# Altium PCB UDEMY_ALI_ALCAN.PcbDoc (part 1 of 3)
Units mm, origin at the board's own origin, x right, y up, seen from the top; angles counter-clockwise.
Board outline 102 x 100 mm, 4 copper layers (Top Layer, GROUND, POWER, Bottom Layer), stack 1.369 mm thick; 127 components, 90 nets, 438 pads, 96 vias.
Unrouted connection lines stored in the file: 1.
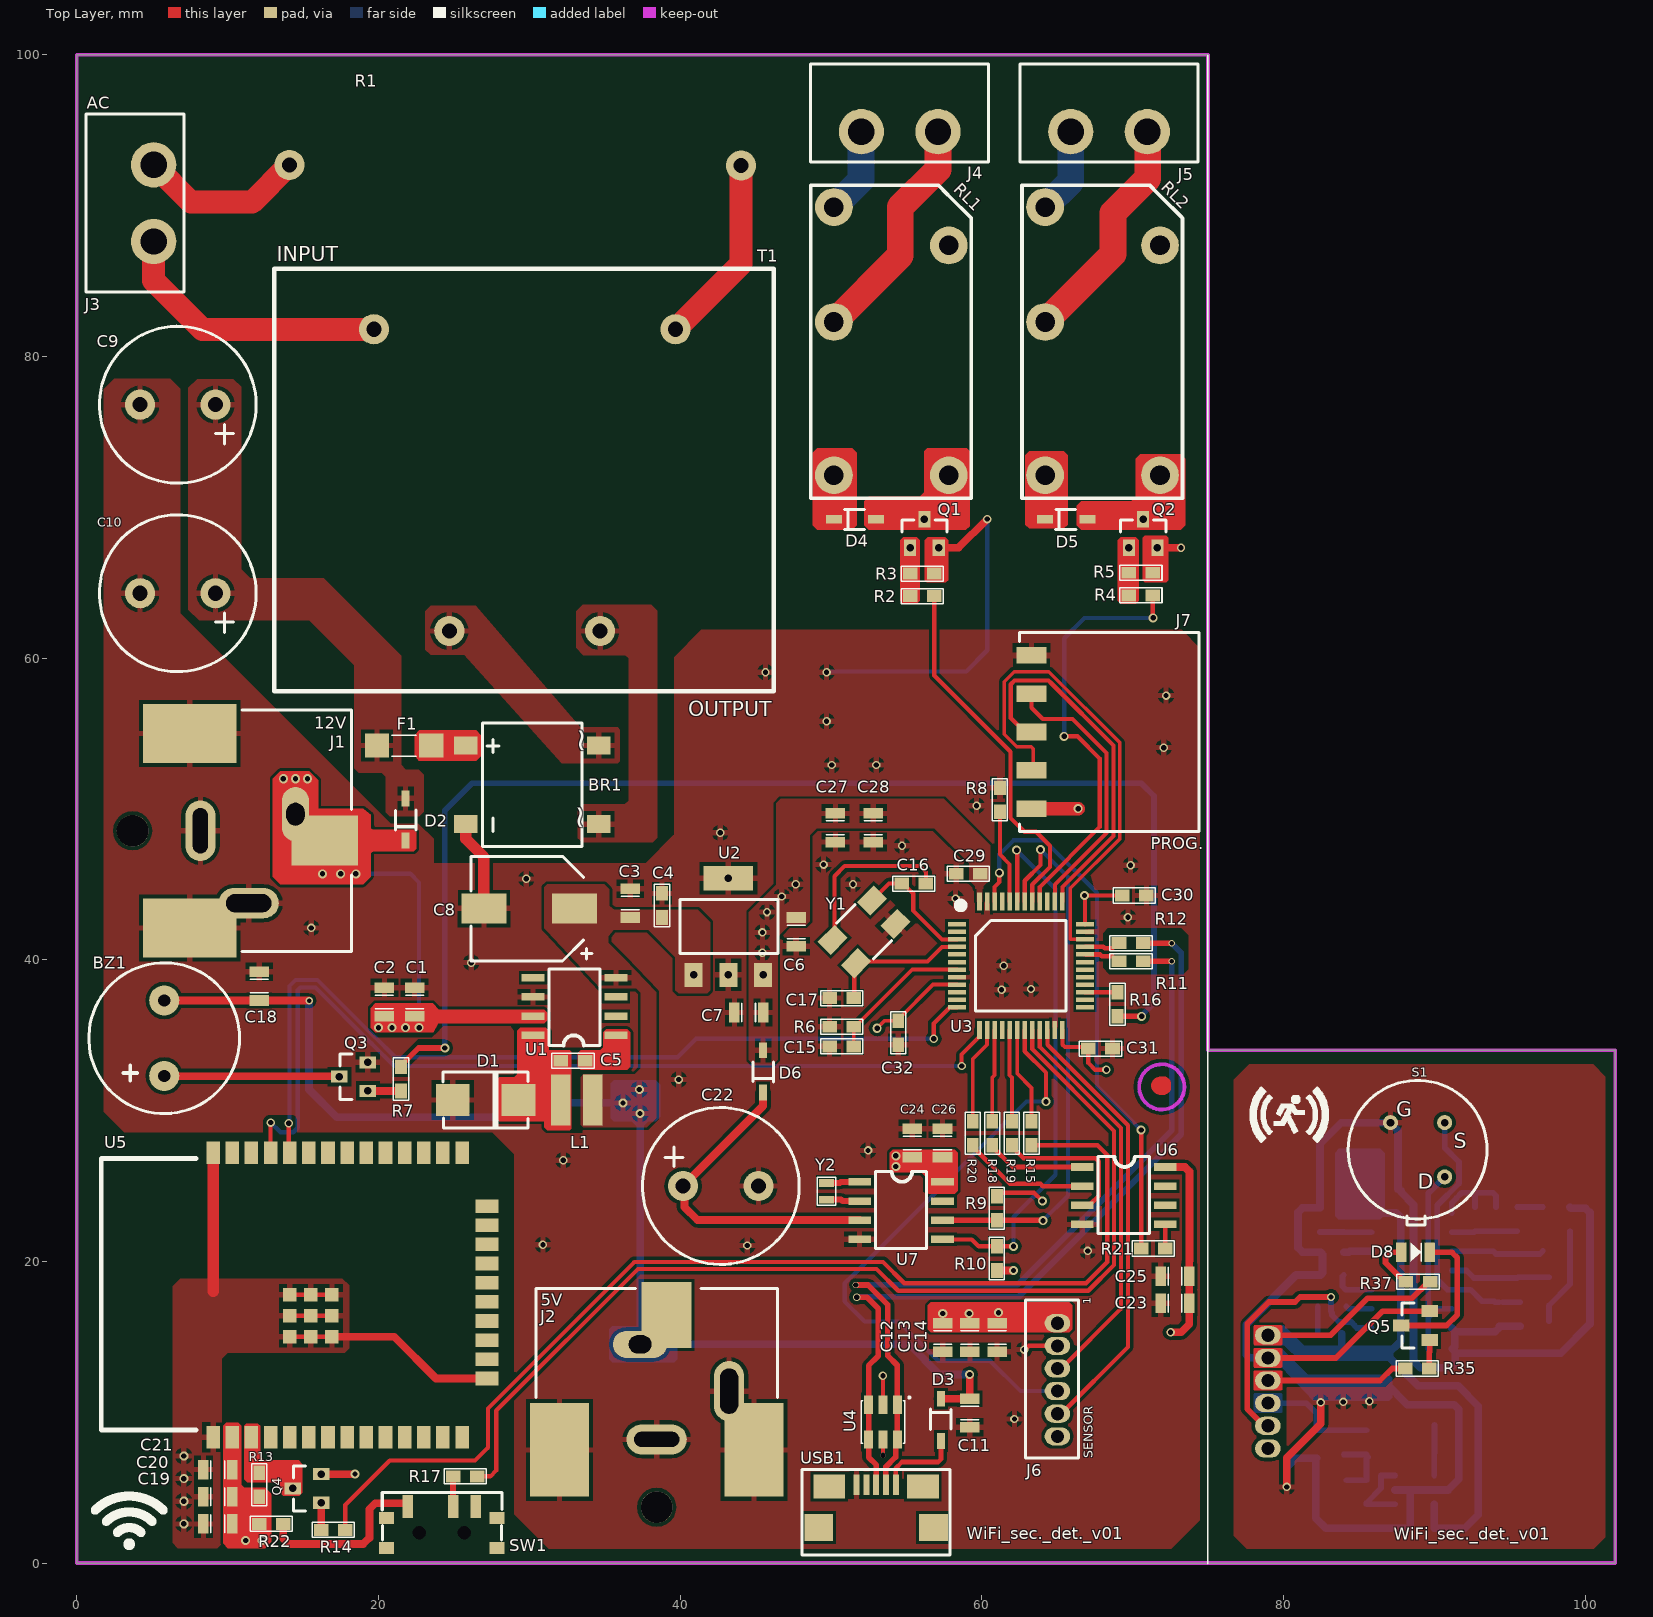
[diagram p0: Top Layer view]
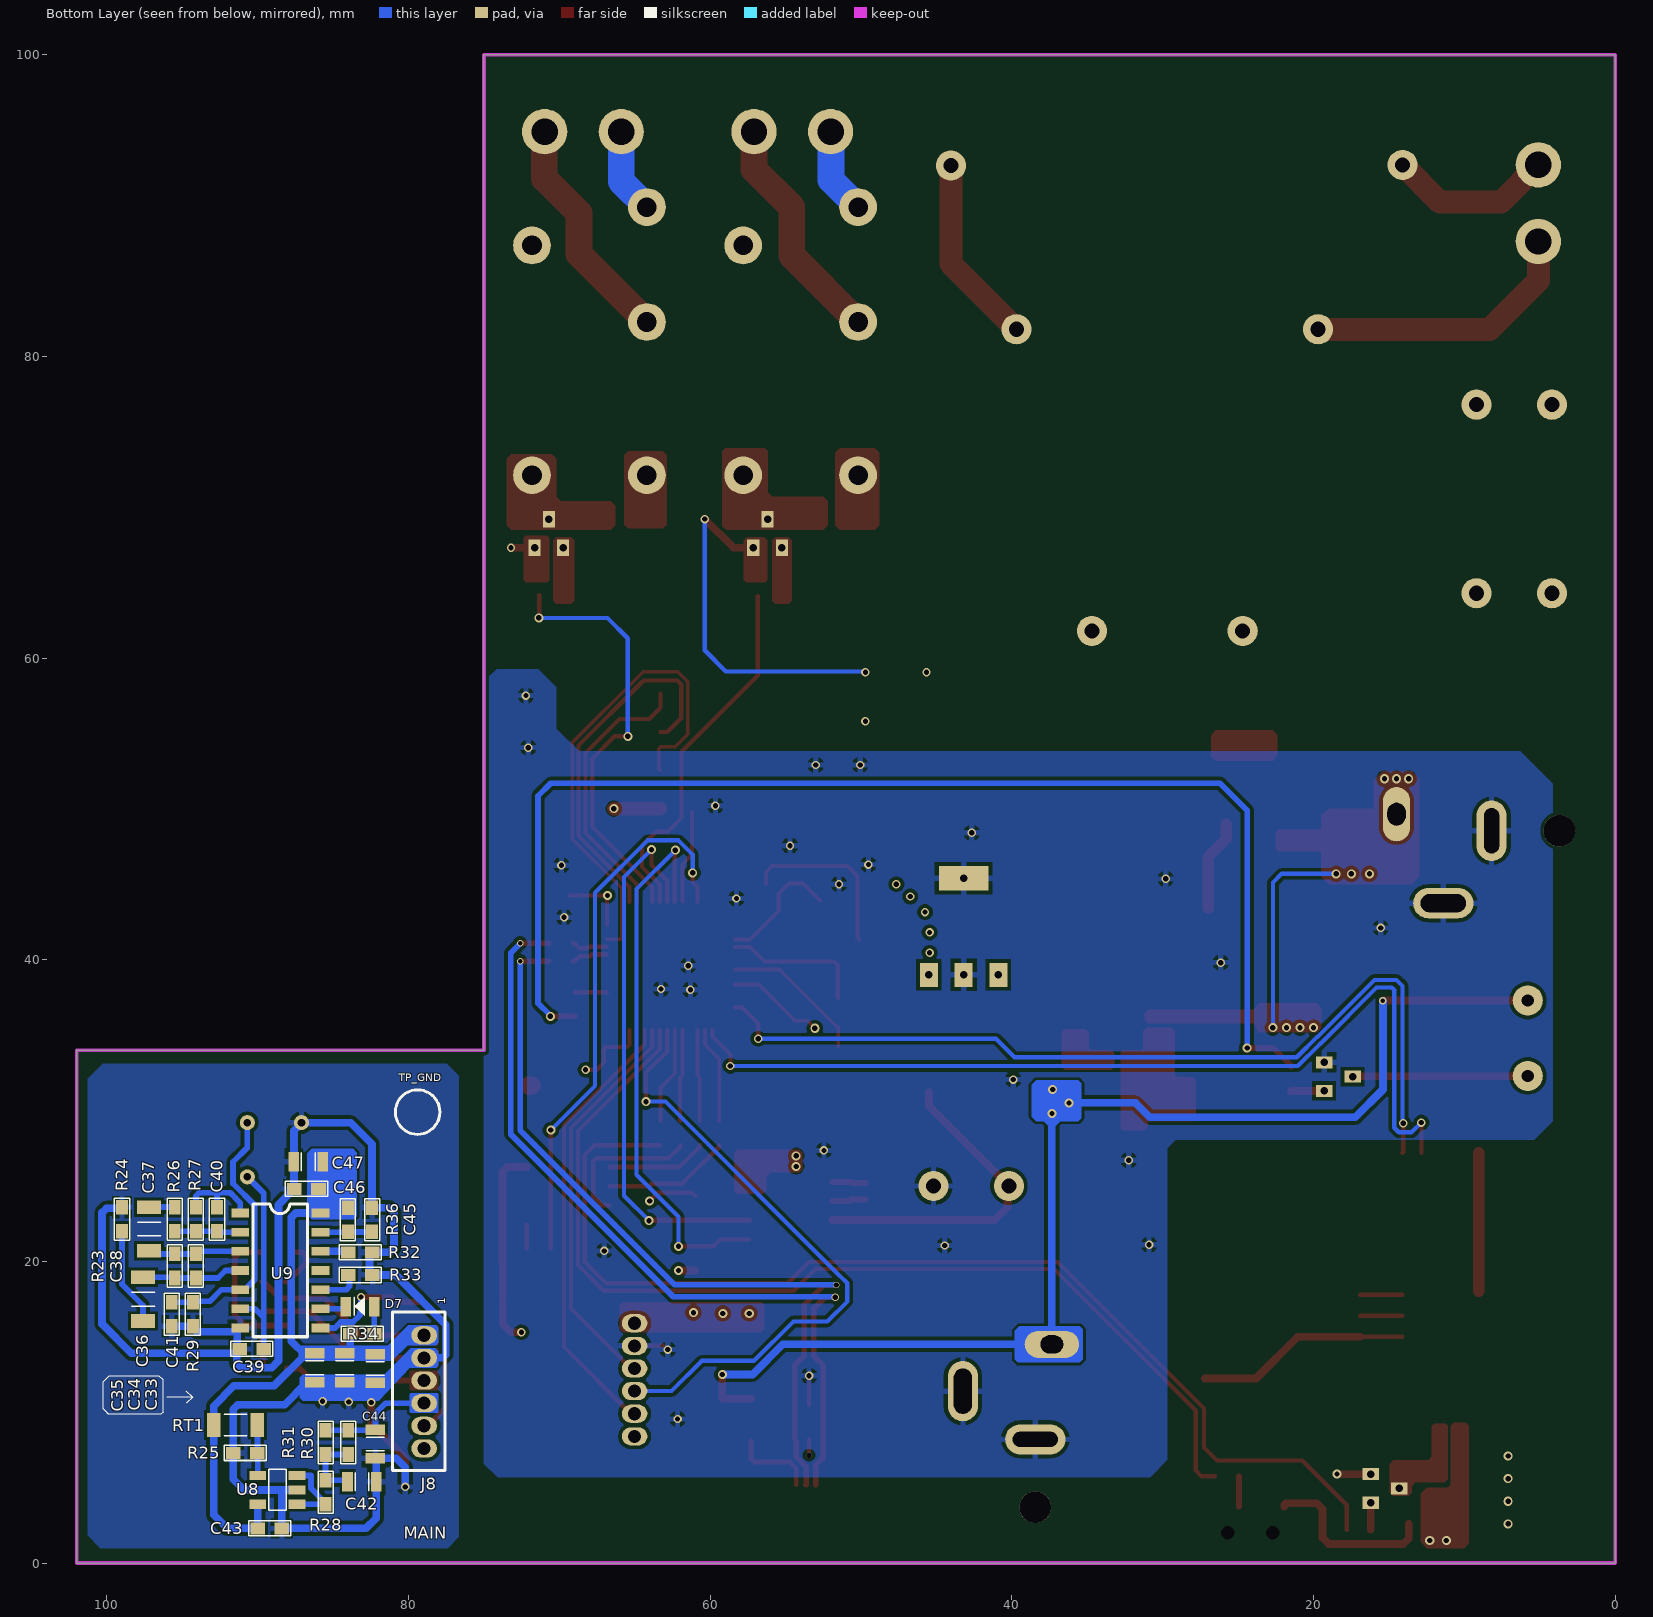
[diagram p1: Bottom Layer view, seen from below]
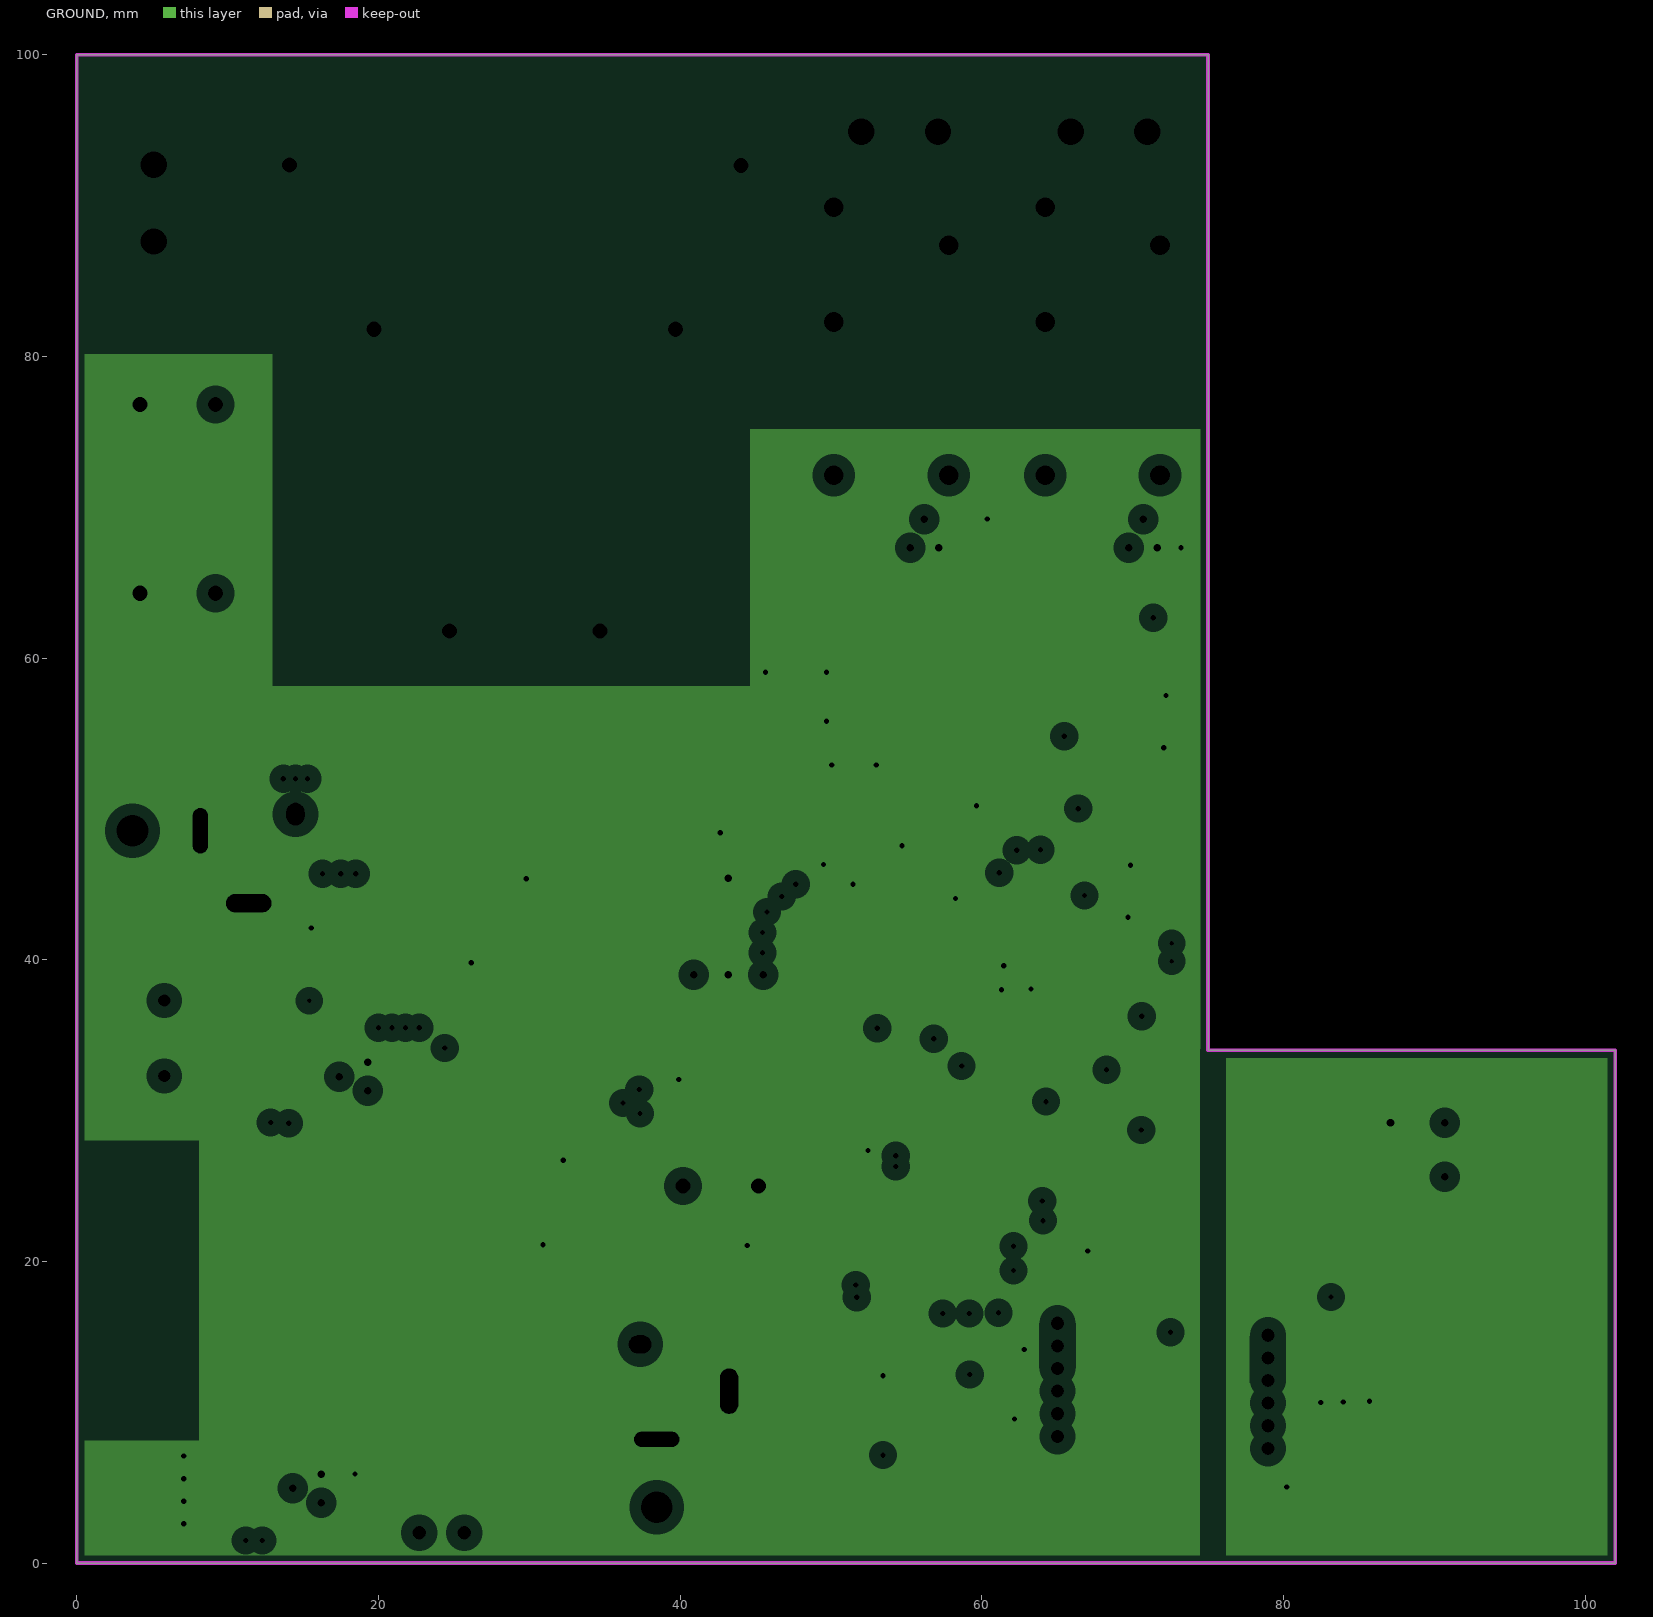
[diagram p2: GROUND, clearances drawn from the general rule]
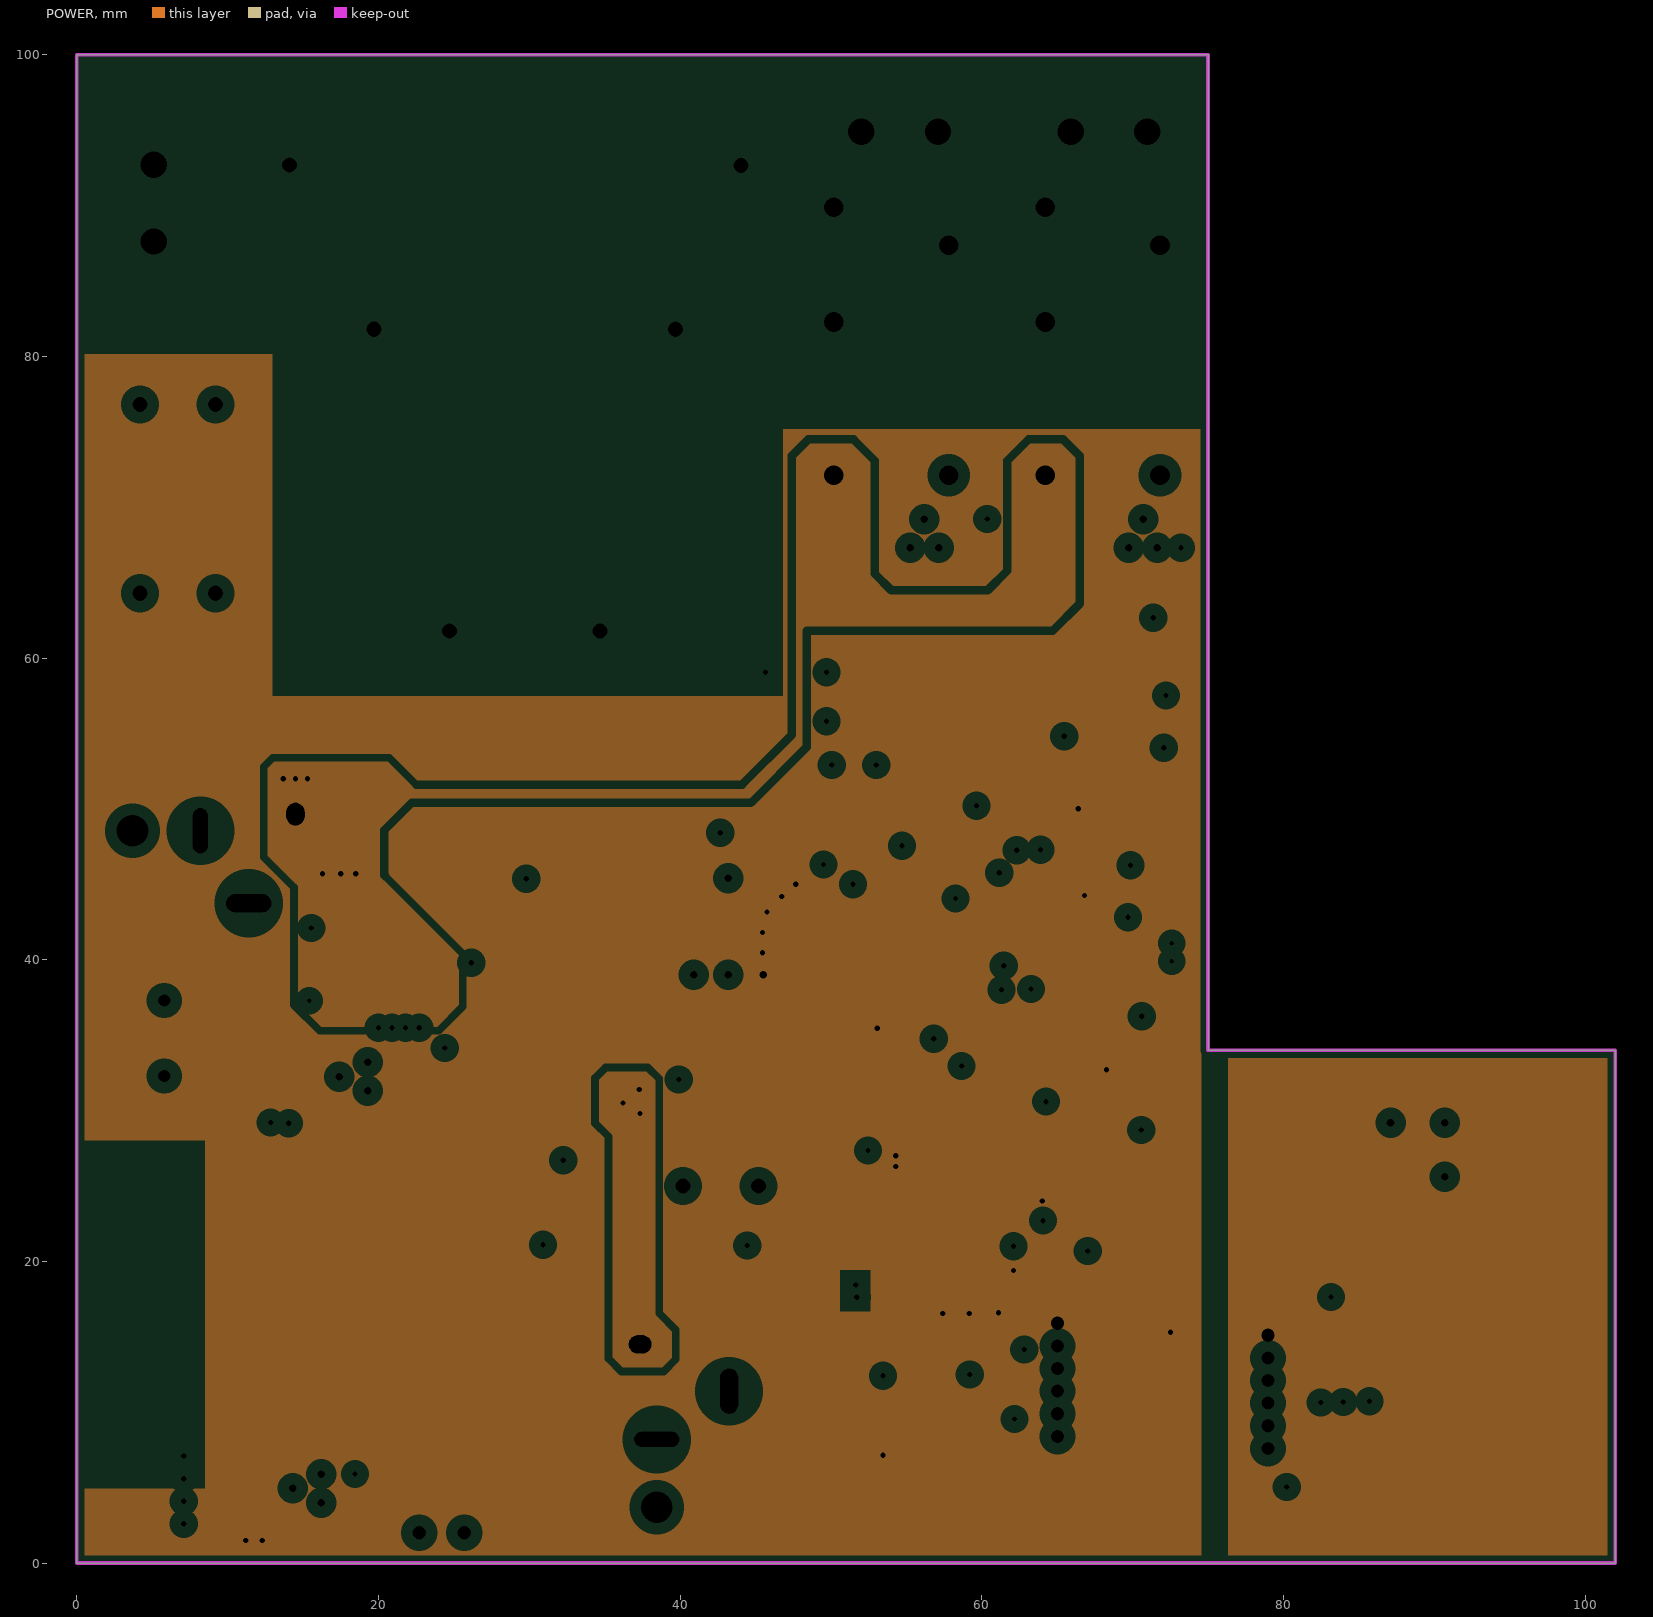
[diagram p3: POWER, clearances drawn from the general rule]
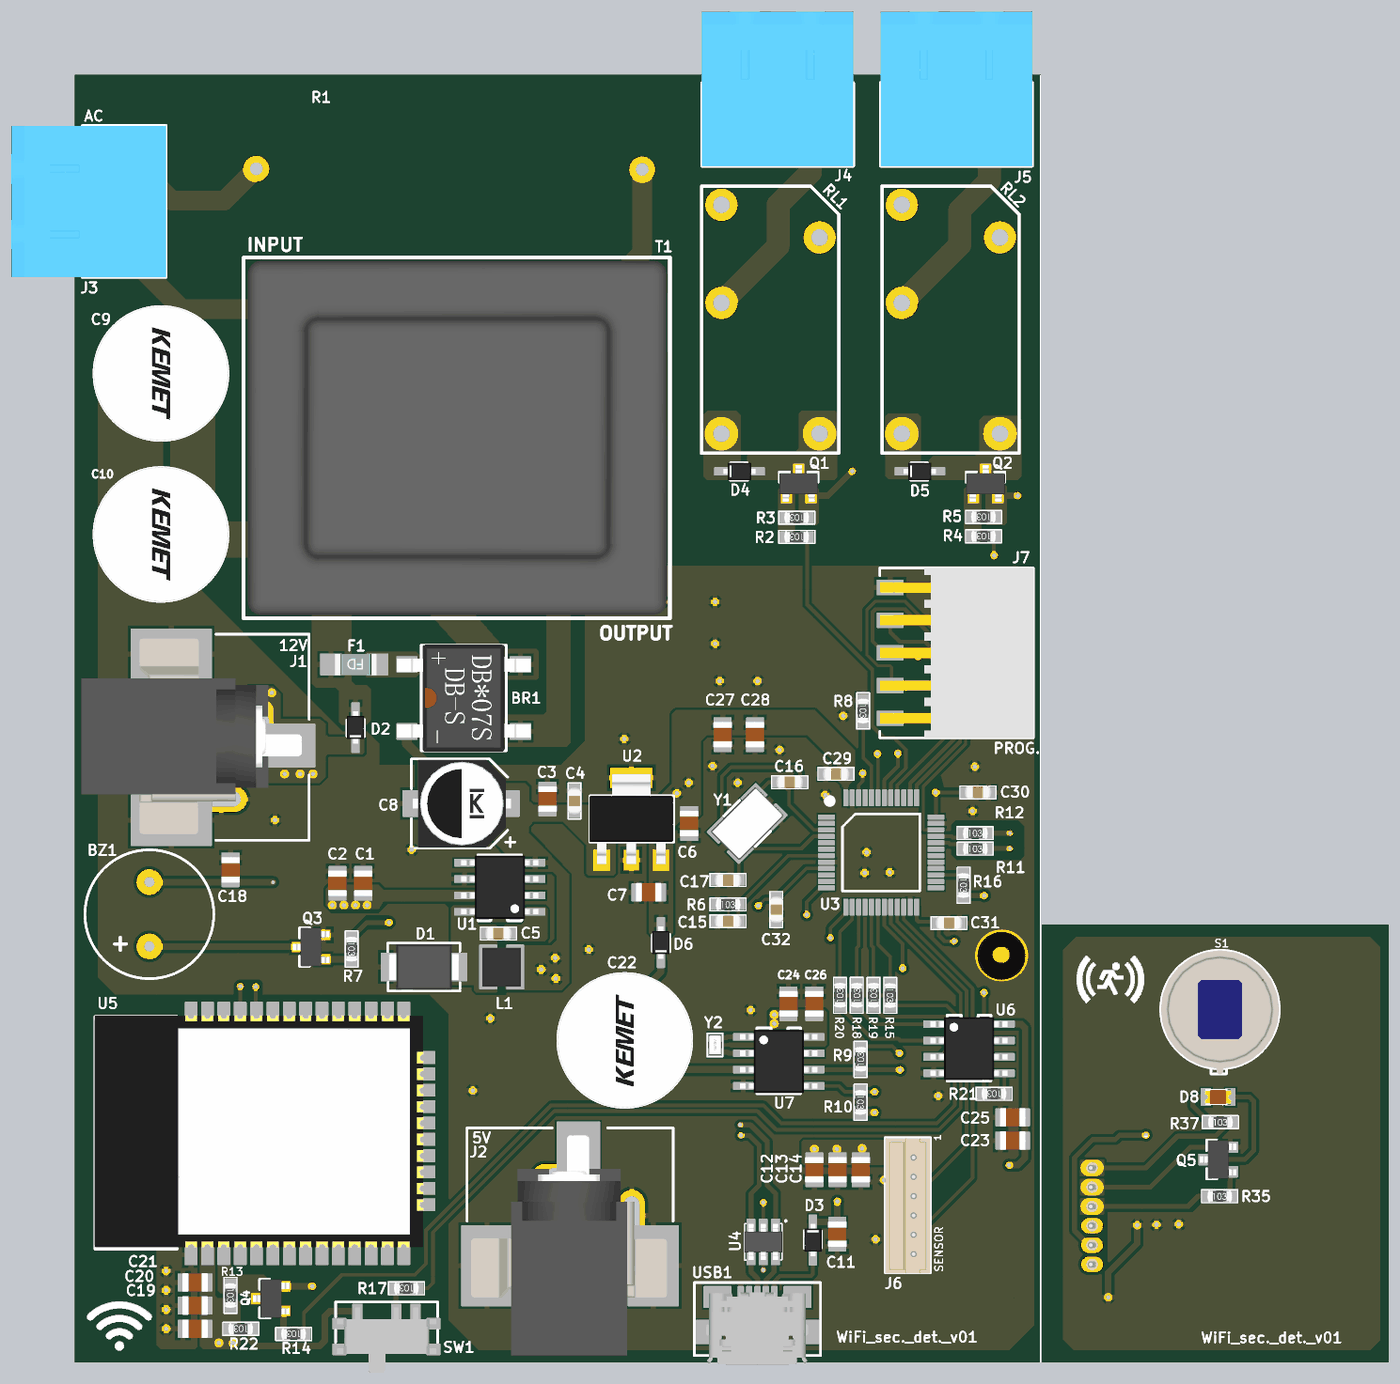
[diagram p5: 3D render of the assembled board from above, using the file's embedded part models]
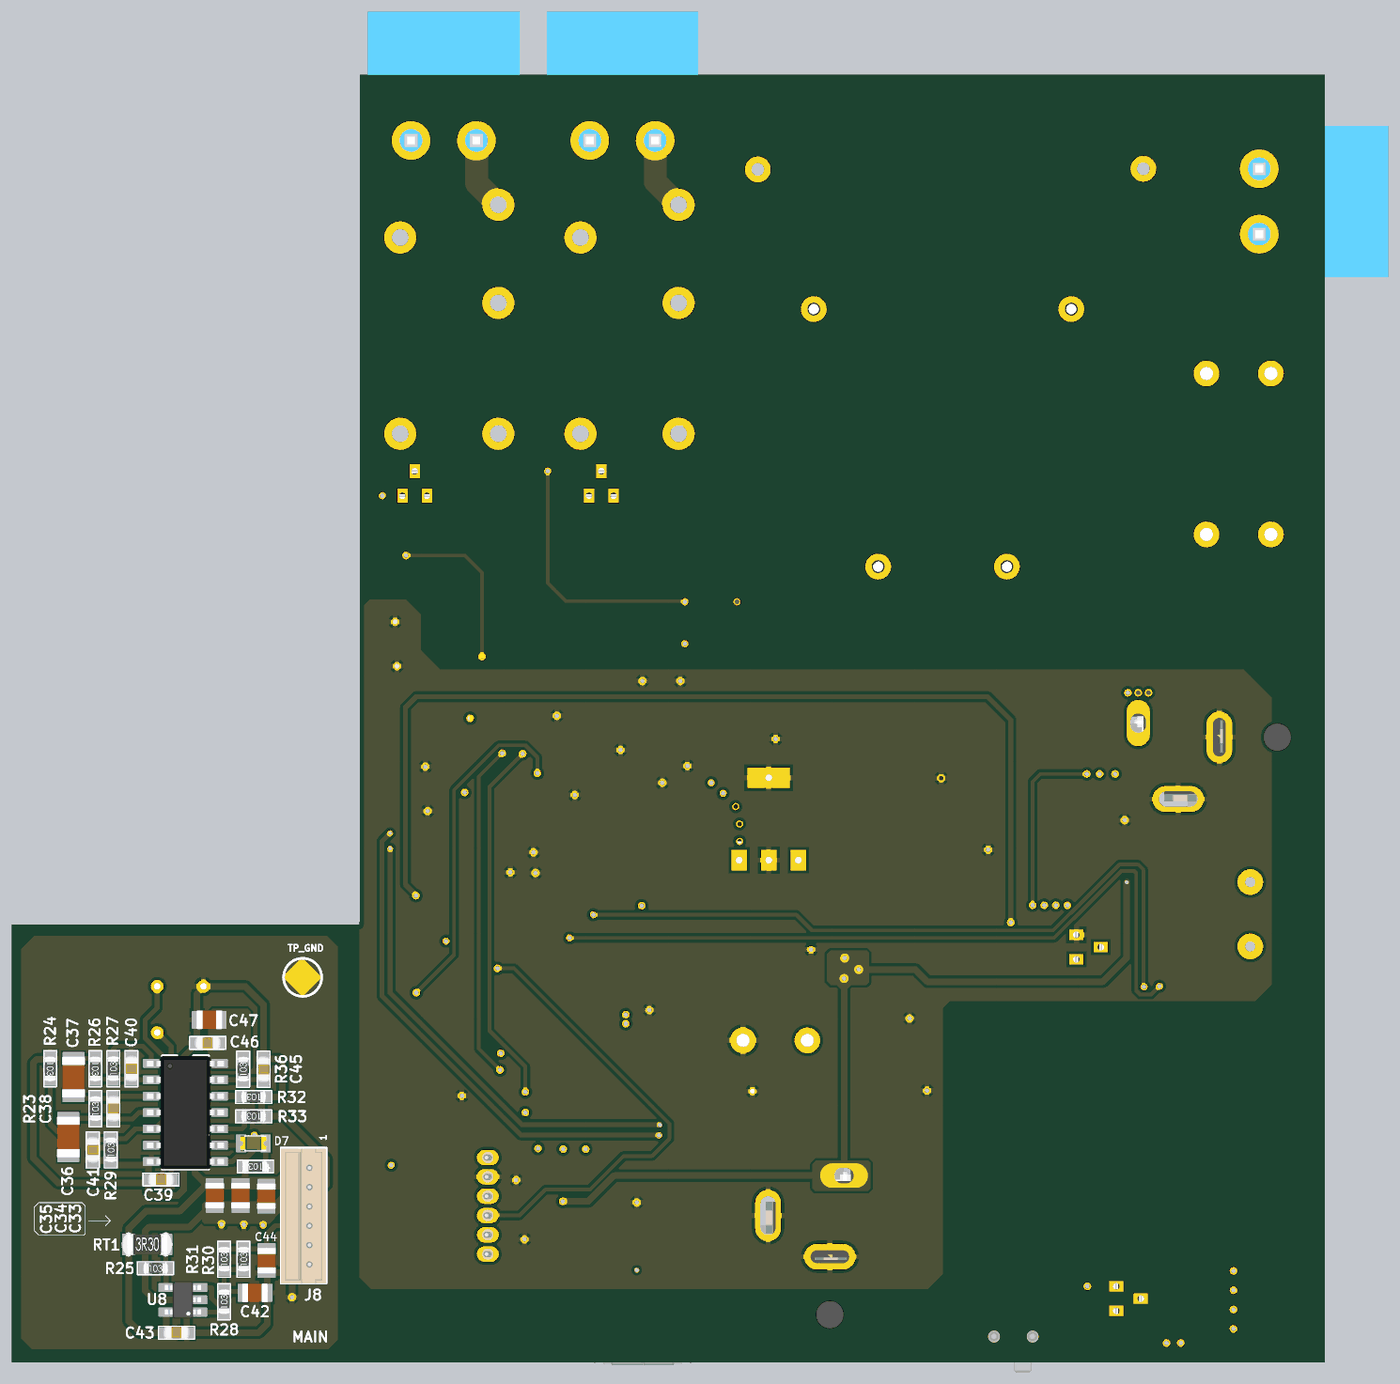
[diagram p6: 3D render of the assembled board from below, using the file's embedded part models]

## Layer stack, top to bottom
Top Solder: solder mask 0.0254, SM-001, Dk 4
Top Layer: signal copper 0.035
Dielectric 1: prepreg 0.1295, PP-017, Dk 4.3
Dielectric 2: prepreg 0.1295, PP-017, Dk 4.3
GROUND: plane copper 0.035, net GND
Dielectric 3: core 0.7112, Core-039, Dk 4.8
POWER: plane copper 0.035, net 12V DC
Dielectric 4: prepreg 0.1295, PP-017, Dk 4.3
Dielectric 5: prepreg 0.1295, PP-017, Dk 4.3
Bottom Layer: signal copper 0.035
Bottom Solder: solder mask 0.0254, SM-001, Dk 4

## Board outline
0,0 102,0 102,34 75,34 75,100 0,100

## Design rules (kind name [scope] priority, off if disabled: settings)
Clearance [All] p1: gap=0.229 ignorepadtopadclearanceinfootprint=TRUE except(0: Arc-Text Track-Text SMDPad-Text THPad-Text Via-Text Fill-Text Poly-Text Region-Text Text-Text Text-Hole; 0.178: Arc-Arc Arc-Track Arc-SMDPad Arc-Via Track-Track Track-SMDPad Track-Via SMDPad-Fill SMDPad-Poly SMDPad-Region Fill-Fill Fill-Poly Fill-Region Poly-Poly Poly-Region Region-Region; 0.203: SMDPad-SMDPad SMDPad-THPad THPad-THPad; 0.254: Arc-THPad Track-THPad SMDPad-Via THPad-Via Via-Via)
ComponentClearance [All] p1: gap=0.127 collisioncheckmode=3 verticalgap=0 showdistances=FALSE
DiffPairsRouting [InDifferentialPair('MCU')] p1: maxlimit=0.208 minlimit=0.208 mostfreqgap=0.208 toplayer_minwidth=0.305 toplayer_maxwidth=0.305 toplayer_prefwidth=0.305 bottomlayer_minwidth=0.305 bottomlayer_maxwidth=0.305 bottomlayer_prefwidth=0.305 impedanceprofiledriven=TRUE impedanceprofileid={9379544E-BAFA-4718-A353-9F6CDB2490BD} impedanceprofilevalue=90.000000 maxuncoupledlength=12.7
DiffPairsRouting DiffPairsRouting_1 [All] p2: maxlimit=0.254 minlimit=0.254 mostfreqgap=0.254 toplayer_minwidth=0.373 toplayer_maxwidth=0.373 toplayer_prefwidth=0.373 bottomlayer_minwidth=0.373 bottomlayer_maxwidth=0.373 bottomlayer_prefwidth=0.373 impedanceprofiledriven=TRUE impedanceprofileid={36EA913B-D849-490D-8D19-D0B1AB4B27B3} impedanceprofilevalue=90.000000 maxuncoupledlength=12.7
MinimumSolderMaskSliver [All] p1: minsoldermaskwidth=0.127
NetAntennae [All] p1: netantennaetolerance=0.254
PasteMaskExpansion [All] p1: expansion=0.05
PlaneClearance [All] p1: clearance=0.762
PlaneConnect [All] p1: planeconnectstyle=Relief reliefexpansion=0.381 reliefentries=4 reliefconductorwidth=0.381 reliefairgap=0.254
PolygonConnect [All] p1: connectstyle=Relief reliefconductorwidth=0.381 reliefentries=4 polygonreliefangle="90 Angle" airgapwidth=0.254
RoutingCorners [All] p1: cornerstyle=45-Degree minsetback=2.032 maxsetback=2.032
RoutingVias [All] p1: holewidth=0.3 width=0.5 viastyle="Through Hole" minholewidth=0.25 minwidth=0.4 maxholewidth=0.5 maxwidth=1
SMDToCorner [All] p1: distance=10000
SilkToSilkClearance [All] p1 off: silktosilkclearance=0
SilkToSolderMaskClearance [IsPad] p1 off: minsilkscreentomaskgap=0.127 clearancetoexposedcopper=TRUE
SolderMaskExpansion [All] p1: expansion=0.05 istentingtop=FALSE
UnRoutedNet [All] p1: checkbadconnections=TRUE
Width [All] p1: maxlimit=1.778 minlimit=0.203 preferedwidth=0.279 minimp=50.000000 maximp=50.000000 favimp=50.000000
19 further rules are at their usual default settings.

## Classes and differential pairs
component class "Sensor Board": C33 C34 C35 C36 C37 C38 C39 C40 C41 C42 C43 C44 C45 C46 C47 D7 D8 J8 Q5 R23 R24 R25 R26 R27 R28 R29 R30 R31 R32 R33 R34 R35 R36 R37 RT1 S1 U8 U9
component class "Power Management": BR1 C1 C2 C3 C4 C5 C6 C7 C8 C9 C10 C11 C12 C13 C14 D1 D2 D3 D4 D5 F1 J1 J2 J3 J4 J5 J6 J7 L1 Q1 Q2 R1 R2 R3 R4 R5 RL1 RL2 T1 U1 U2 USB1
component class Microcontroller: BZ1 C15 C16 C17 C18 C19 C20 C21 C22 C23 C24 C25 C26 C27 C28 C29 C30 C31 C32 D6 Q3 Q4 R6 R7 R8 R9 R10 R11 R12 R13 R14 R15 R16 R17 R18 R19 R20 R21 R22 SW1 U3 U4 U5 U6 U7 Y1 Y2
differential pair MCU: +MCU_P -MCU_N
differential pair USB: +USB_P -USB_N

## Components (designator, comment, footprint, x,y, rotation, side; value= is the part's Value field where it differs from the comment)
BR1 "Bridge Diode AC-DC" DB105STR 30.2,51.595 r90 top
BZ1 "CMI-9605IC-0580T" CMI-9605IC 5.8,34.8 r180 top
C1 "CL21B105KBFNNNE" CAP_0805 22.4,37.2 r90 top value=1uF
C2 "CL21B104KBCNNNC" CAP_0805 20.4,37.2 r90 top value=100nF
C3 "CL21B105KBFNNNE" CAP_0805 36.7,43.75 r270 top value=1uF
C4 "C0603C104K5RACTU" CAP_0603 38.8,43.6 r270 top value=100nF
C5 "0603B103K160CT" CAP_0603 32.9,33.3 r180 top value=10nF
C6 "CL21A475KAQNNNE" CAP_0805 47.7,41.85 r90 top value=4.7uF
C7 "CL21B105KBFNNNE" CAP_0805 44.55,36.5 r0 top value=1uF
C8 "EEV686M035A9HAA" CAP_EEVSERIES 30,43.4 r180 top value=68nF
C9 "ESH477M050AH4AA" CAP_RADIAL_D10_P5 6.7,76.8 r180 top value=470uF
C10 "ESH477M050AH4AA" CAP_RADIAL_D10_P5 6.7,64.3 r180 top value=470uF
C11 "CL21A475KAQNNNE" CAP_0805 59.2,9.95 r90 top value=4.7uF
C12 "CL21A475KAQNNNE" CAP_0805 57.416,14.954 r90 top value=4.7uF
C13 "CL21A475KAQNNNE" CAP_0805 59.216,14.954 r90 top value=4.7uF
C14 "CL21B105KBFNNNE" CAP_0805 61.016,14.954 r90 top value=1uF
C15 "C0603C104K5RACTU" CAP_0603 50.713,34.259 r0 top value=100nF
C16 "CL10C200JB8NNNC" CAP_0603 55.5,45.05 r180 top value=20pF
C17 "CL10C200JB8NNNC" CAP_0603 50.713,37.459 r0 top value=20pF
C18 "CL21B104KBCNNNC" CAP_0805 12.1,38.25 r270 top value=100nF
C19 "CL21A475KAQNNNE" CAP_0805 9.35,2.6 r0 top value=4.7uF
C20 "CL21B105KBFNNNE" CAP_0805 9.35,4.4 r0 top value=1uF
C21 "CL21B104KBCNNNC" CAP_0805 9.35,6.2 r0 top value=100nF
C22 "ESH477M050AH4AA" CAP_RADIAL_D10_P5 42.7,25 r0 top value=470uF
C23 "CL21B105KBFNNNE" CAP_0805 72.812,17.222 r0 top value=1uF
C24 "CL21B104KBCNNNC" CAP_0805 55.4,27.85 r270 top value=100nF
C25 "CL21B104KBCNNNC" CAP_0805 72.812,19.022 r0 top value=100nF
C26 "CL21B105KBFNNNE" CAP_0805 57.4,27.85 r270 top value=1uF
C27 "CL21A475KAQNNNE" CAP_0805 50.3,48.75 r90 top value=4.7uF
C28 "CL21B105KBFNNNE" CAP_0805 52.8,48.75 r90 top value=1uF
C29 "C0603C104K5RACTU" CAP_0603 59.1,45.7 r0 top value=100nF
C30 "C0603C104K5RACTU" CAP_0603 70.118,44.261 r180 top value=100nF
C31 "C0603C104K5RACTU" CAP_0603 67.867,34.109 r180 top value=100nF
C32 "C0603C104K5RACTU" CAP_0603 54.464,35.159 r90 top value=100nF
C33 "CL21A475KAQNNNE" CAP_0805 82.218,12.9 r90 bottom value=4.7uF
C34 "CL21A475KAQNNNE" CAP_0805 84.219,12.95 r90 bottom value=4.7uF
C35 "CL21B105KBFNNNE" CAP_0805 86.219,12.95 r90 bottom value=1uF
C36 "C3216X5R1E336M160AC" CAP_1206 97.6,17.5 r90 bottom value=33uF
C37 "C3216X5R1E336M160AC" CAP_1206 97.2,22.15 r90 bottom value=33uF
C38 "0603B103K160CT" CAP_0603 94.1,19.7 r90 bottom value=10nF
C39 "C0603C104K5RACTU" CAP_0603 90.4,14.2 r180 bottom value=100nF
C40 "0603B103K160CT" CAP_0603 92.7,22.8 r90 bottom value=10nF
C41 "C0603C104K5RACTU" CAP_0603 95.7,16.5 r90 bottom value=100nF
C42 "CL21A475KAQNNNE" CAP_0805 83.1,5.4 r0 bottom value=4.7uF
C43 "C0603C104K5RACTU" CAP_0603 89.2,2.3 r0 bottom value=100nF
C44 "CL21B105KBFNNNE" CAP_0805 82.2,7.9 r270 bottom value=1uF
C45 "C0603C104K5RACTU" CAP_0603 82.421,22.756 r270 bottom value=100nF
C46 "C0603C104K5RACTU" CAP_0603 86.772,24.806 r180 bottom value=100nF
C47 "CL21B105KBFNNNE" CAP_0805 86.65,26.6 r180 bottom value=1uF
D1 "1SMB5919BT3G" SMB 27.115,30.7 r180 top
D2 "1N4148WS" SOD323F 21.8,49.3 r90 top
D3 "1N4148WS" SOD323F 57.3,9.5 r270 top
D4 "1N4148WS" SOD323F 51.6,69.2 r0 top
D5 "1N4148WS" SOD323F 65.6,69.2 r0 top
D6 "1N4148WS" SOD323F 45.5,32.6 r90 top
D7 "LH R974-LP-1-0-20-R18" LED_GREEN_0805 83.221,17.004 r180 bottom
D8 "LH R974-LP-1LH R974-LP-1-0-20-R18" LED_RED_0805 88.75,20.6 r180 top
F1 "FUSE 3413.0216.22" 3413.0216.22 21.7,54.2 r180 top
J1 "PJ-037AH-SMT-TR" JACK 10.075,48.55 r0 top
J2 "PJ-037AH-SMT-TR" JACK 38.45,10.075 r90 top
J3 "TBP01R1-508-02BE" TBP01R1-508 5.1,90.16 r270 top
J4 "TBP01R1-508-02BE" TBP01R1-508 54.56,94.9 r180 top
J5 "TBP01R1-508-02BE" TBP01R1-508 68.44,94.9 r180 top
J6 "64800611622" 64800611622 65.016,12.154 r270 top
J7 "SMH-105-02-L-S" PINHEADER1X5_RA 63.3,55.1 r90 top
J8 "64800611622" 64800611622 78.97,11.353 r270 bottom
L1 "78438335470" IND_1212 33.15,30.7 r0 top value=47uH
Q1 "MMBT3904-7-F" SOT-23F#1 56.2,68.255 r0 top
Q2 "MMBT3904-7-F" SOT-23F#1 70.7,68.255 r0 top
Q3 "MMBT3904-7-F" SOT-23F#1 18.355,32.25 r90 top
Q4 "MMBT3904-7-F" SOT-23F#1 15.255,4.95 r90 top
Q5 "MMBT3904-7-F" SOT-23F#2 88.755,15.75 r90 top
R1 "Resistor 5Watt Cermet" RES_AXIAL_W 29.111,92.7 r0 top
R2 "RC0603JR-071KL" RES_0603 56.05,64.11 r180 top value=1K
R3 "RC0603FR-0710KL" RES_0603 56.05,65.6 r180 top value=10K
R4 "RC0603JR-071KL" RES_0603 70.55,64.155 r180 top value=1K
R5 "RC0603FR-0710KL" RES_0603 70.55,65.655 r180 top value=10K
R6 "RC0603JR-07100RL" RES_0603 50.713,35.559 r0 top value=100R
R7 "RC0603JR-07100RL" RES_0603 21.5,32.1 r270 top value=100R
R8 "RC0603JR-07100RL" RES_0603 61.2,50.6 r270 top value=100R
R9 "RC0603JR-074K7L" RES_0603 61,23.533 r90 top value=4.7K
R10 "RC0603JR-074K7L" RES_0603 61,20.2 r270 top value=4.7K
R11 "RC0603JR-07100RL" RES_0603 69.9,39.9 r0 top value=100R
R12 "RC0603JR-07100RL" RES_0603 69.9,41.1 r0 top value=100R
R13 "RC0603JR-071KL" RES_0603 12.1,5.2 r270 top value=1K
R14 "RC0603JR-07100RL" RES_0603 17,2.2 r180 top value=100R
R15 "RC0603JR-07100RL" RES_0603 63.3,28.5 r270 top value=100R
R16 "RC0603JR-07100RL" RES_0603 69,37.05 r270 top value=100R
R17 "RC0603JR-07100RL" RES_0603 25.756,5.751 r180 top value=100R
R18 "RC0603JR-07100RL" RES_0603 60.7,28.5 r90 top value=100R
R19 "RC0603JR-07100RL" RES_0603 62,28.5 r90 top value=100R
R20 "RC0603JR-07100RL" RES_0603 59.4,28.5 r90 top value=100R
R21 "RC0603JR-07100RL" RES_0603 71.368,20.855 r180 top value=100R
R22 "RC0603JR-07100RL" RES_0603 12.9,2.6 r180 top value=100R
R23 "RC0603JR-07560KL" RES_0603 95.5,19.7 r90 bottom value=560K
R24 "RC0603FR-0710KL" RES_0603 99,22.8 r270 bottom value=10K
R25 "RC0603FR-0710KL" RES_0603 90.823,7.302 r180 bottom value=10K
R26 "RC0603FR-0710KL" RES_0603 95.5,22.8 r270 bottom value=10K
R27 "RC0603JR-07560KL" RES_0603 94.1,22.8 r90 bottom value=560K
R28 "RC0603JR-071KL" RES_0603 85.5,4.7 r90 bottom value=1K
R29 "RC0603JR-0743KL" RES_0603 94.3,16.5 r90 bottom value=43K
R30 "RC0603JR-07220KL" RES_0603 84,8 r90 bottom value=220K
R31 "RC0603JR-07220KL" RES_0603 85.5,8 r90 bottom value=220K
R32 "RC0603JR-070RL" RES_0603 83.2,20.6 r0 bottom value=0mR
R33 "RC0603JR-070RL" RES_0603 83.2,19.1 r0 bottom value=0mR
R34 "RC0603JR-071KL" RES_0603 83.071,15.204 r0 bottom value=1K
R35 "RC0603JR-071KL" RES_0603 88.872,12.903 r0 top value=1K
R36 "RC0603JR-07220KL" RES_0603 84.021,22.756 r90 bottom value=220K
R37 "RC0603JR-07100RL" RES_0603 88.922,18.655 r0 top value=100R
RL1 "ALQ112" ALQ112 54.01,81.01 r90 top
RL2 "ALQ112" ALQ112 68.01,81.01 r90 top
RT1 "TFPT1206L1002FM" RES_1206 91.473,9.152 r0 bottom value=10kR
S1 "LHI 878/3902" "LHI 878" 88.896,27.404 r0 top
SW1 "EG1215AA" EG1215AA 24.2,2.375 r0 top
T1 "BV302S12010-ZU" BV302S12010-ZU 29.7,71.8 r0 top
U1 "LM2675MX-12/NOPB" SOIC8 33,36.9 r90 top
U2 "AP7361-33E-13" SOT223 43.2,42.2 r0 top
U3 "STM32F103C6T6A" LQFP-48 62.6,39.6 r270 top
U4 "USBLC6-2SC6" SOT23-6L 53.45,9.35 r270 top value=3.5pF
U5 "ESP32-WROOM-32" ESP32-32 17.919,17.923 r90 top
U6 "MAX6662MSA+" SOIC8 69.417,24.356 r270 top
U7 "M41T00M6F" SOIC8 54.65,23.368 r270 top
U8 "OPA314AIDBVR" SOT23-5 88.7,4.85 r0 bottom
U9 "NCS36000DRG" SOIC14 88.5,19.4 r180 bottom
USB1 "10118192-0001LF" MICRO_B_USB 53,5.2 r0 top
Y1 "ECS-160-20-30B-TR" ECS 52.2,41.85 r45 top
Y2 "ABS05-32.768KHZ-T" ABS05 49.7,24.65 r90 top

## Footprints (in the part's own frame and the unit in brackets; to place one, negate y for a bottom-side part, rotate by r counter-clockwise, add the part's x,y. Pads: shape width x height; smd on the part's side, far side on the other; paste and mask are expansions set on the pad)
3413.0216.22 [mm]
  rect 1.6x1.6 smd mask+0.05: 1(-1.8,0) 2(1.8,0)
  silkscreen extent -0.8,-0.7 0.8,0.7, body extent -1.75,-0.82 1.5,0.82, height 0.4
64800611622 [mm]
  oval 1.2x1.7 hole 0.87 mask+0.05: 1(-3.75,0) 2(-2.25,0) 3(-0.75,0) 4(0.75,0) 5(2.25,0) 6(3.75,0)
  silkscreen extent -5.3,-2.1 5.2,1.4, body extent -5.25,-2.1 5.25,1.4, height 4.45
ABS05 [mm]
  rect 0.5x1 smd mask+0.05: 1(-0.55,0) 2(0.55,0)
  silkscreen extent -0.91,-0.61 0.91,0.61, body extent -0.8,-0.5 0.8,0.5, height 0.5
ALQ112 [mm]
  round 2.5 hole 1.3 mask+0.05: 1(6.35,-3.81) 2(1.27,3.81) 3(8.89,3.81) 4(-8.89,-3.81) 5(-8.89,3.81)
  silkscreen extent -10.41,-5.3 10.34,5.34, body extent -10,-4.98 10,5.02, height 15.6
BV302S12010-ZU [mm]
  round 2 hole 1 mask+0.05: 1(10,10) 5(-10,10) 7(-5,-10) 9(5,-10)
  silkscreen extent -16.6,-14 16.5,14, body extent -16.25,-13.75 16.25,13.75, height 21.8
CAP_0603 [mil]
  rect 38x31 smd mask+1.97: 1(-31.5,0) 2(31.5,0)
  silkscreen extent -55,-20 55,20, body extent -41,-21 41,20, height 31
CAP_0805 [mm]
  rect 0.7x1.3 smd mask+0.05: ""(-0.95,0) ""(0.95,0)
  silkscreen extent -0.45,-0.6 0.45,0.6, body extent -1,-0.72 1,0.73, height 1.23
CAP_1206 [mm]
  rect 0.9x1.6 smd mask+0.05: 1(-1.45,0) 2(1.45,0)
  silkscreen extent -0.46,-0.76 0.46,0.76, body extent -1.6,-0.91 1.6,0.89, height 1.6
CAP_EEVSERIES [mm]
  rect 3x2 smd mask+0.05: 1(-3,0) 2(3,0)
  silkscreen extent -4.17,-3.45 3.86,3.48, body extent -3.85,-3.4 3.75,3.4, height 8.01
CAP_RADIAL_D10_P5 [mm]
  round 2 hole 1 mask+0.05: 1(-2.5,0) 2(2.5,0)
  silkscreen extent -5.2,-5.2 5.2,5.2, body extent -5.25,-5.25 5.25,5.25, height 22.2
CMI-9605IC [mm]
  round 2 hole 0.8 mask+0.05: 1(0,2.5) 2(0,-2.5)
  silkscreen extent -5,-5 5,5, body extent -4.84,-4.78 4.76,6.3, height 5.16
DB105STR [mm]
  rect 1.2x1.55 smd mask+0.05: 1(-2.605,-4.4) 2(2.605,-4.4) 3(2.605,4.4) 4(-2.605,4.4)
  silkscreen extent -4.1,-3.3 4.1,3.3, body extent -4.16,-5.2 4.16,5.2, height 2.66
ECS [mm]
  rect 1.6x1.25 smd mask+0.05: 1(-1.85,-1.1) 2(1.85,-1.1) 3(1.85,1.1) 4(-1.85,1.1)
  silkscreen extent -0.89,-1.7 0.89,1.7, body extent -2.5,-1.6 2.5,1.6, height 0.85
EG1215AA [mm]
  rect 0.7x1.5 smd mask+0.05: 1(-2.25,1.375) 2(0.75,1.375) 3(2.25,1.375)
  round 0 hole 0.9 mask+0.05: 6(-1.5,-0.375) 6(1.5,-0.375)
  rect 1x0.8 smd mask+0.05: ""(-3.65,-1.375) ""(-3.65,0.625) ""(3.65,-1.375) ""(3.65,0.625)
  silkscreen extent -3.95,-0.85 3.98,2.31, body extent -3.84,-3.21 3.86,1.88, height 1.4
ESP32-32 [mm]
  rect 1.5x0.9 smd mask+0.05: 1(-9.575,8.881) 2(-9.575,7.611) 3(-9.575,6.341) 4(-9.575,5.071) 5(-9.575,3.801) 6(-9.575,2.531) 7(-9.575,1.261) 8(-9.575,-0.009) 9(-9.575,-1.279) 10(-9.575,-2.549) 11(-9.575,-3.819) 12(-9.575,-5.089) 13(-9.575,-6.359) 14(-9.575,-7.629) 25(9.275,-7.629) 26(9.275,-6.359) 27(9.275,-5.089) 28(9.275,-3.819) 29(9.275,-2.549) 30(9.275,-1.279) 31(9.275,-0.009) 32(9.275,1.261) 33(9.275,2.531) 34(9.275,3.801) 35(9.275,5.071) 36(9.275,6.341) 37(9.275,7.611) 38(9.275,8.881)
  rect 0.9x1.5 smd mask+0.05: 15(-5.683,-9.28) 15(-5.683,-9.28) 16(-4.413,-9.28) 17(-3.143,-9.28) 18(-1.873,-9.28) 19(-0.603,-9.28) 20(0.667,-9.28) 21(1.937,-9.28) 22(3.207,-9.28) 23(4.477,-9.28) 24(5.747,-9.28)
  rect 0.9x0.9 smd mask+0.05: 39(-2.925,3.8) 39(-2.925,1) 39(-2.925,2.4) 39(-1.525,2.4) 39(-1.525,3.8) 39(-1.525,1) 39(-0.125,3.8) 39(-0.125,2.4) 39(-0.125,1)
  silkscreen extent -9.1,10 8.9,16.3, body extent -9.04,-9.16 9.04,16.38, height 3
IND_1212 [mm]
  rect 1.3x3.4 smd mask+0.05: 1(-1.05,0) 2(1.05,0)
  body extent -1.5,-1.5 1.5,1.5, height 1.2
JACK [mm]
  oval 1.8x3.6 hole 1.2 slot 1.5 at 90 deg: 1(4.425,1.1)
  rect 4.4x3.3 smd: 1(6.375,-0.65)
  rect 6.2x3.9 smd: 2(-2.575,6.45) 3(-2.575,-6.45)
  oval 2x4 hole 1 slot 3 at 90 deg: 2(-1.875,0)
  oval 4x2 hole 1.2 slot 3 at 0 deg: 3(1.325,-4.8)
  round 2.1 hole 2.1 unplated: ""(-6.375,0)
  silkscreen extent 0.89,-8 8.13,8, body extent -9.54,-7.53 7.56,7.67, height 11
LED_GREEN_0805 [mm]
  rect 0.7x1.3 smd mask+0.05: 1(-0.95,0) 2(0.95,0)
  silkscreen extent -0.38,-0.61 0.32,0.63, body extent -1.01,-0.63 1.01,0.63, height 1.1
LED_RED_0805 [mm]
  rect 0.7x1.3 smd mask+0.05: 1(-0.95,0) 2(0.95,0)
  silkscreen extent -0.38,-0.63 0.33,0.61, body extent -1.01,-0.63 1.01,0.63, height 1.1
"LHI 878" [mm]
  round 1 hole 0.5 mask+0.05: 1(-1.796,1.796) 2(1.796,1.796) 3(1.796,-1.796)
  silkscreen extent -4.6,-5 4.6,4.6, body extent -4.6,-5.03 4.6,4.6, height 4.6
LQFP-48 [mm] "7mm x 7mm"
  rect 0.3x1.2 smd mask+0.05: 1(-2.75,-4.25) 2(-2.25,-4.25) 3(-1.75,-4.25) 4(-1.25,-4.25) 5(-0.75,-4.25) 6(-0.25,-4.25) 7(0.25,-4.25) 8(0.75,-4.25) 9(1.25,-4.25) 10(1.75,-4.25) 11(2.25,-4.25) 12(2.75,-4.25) 25(2.75,4.25) 26(2.25,4.25) 27(1.75,4.25) 28(1.25,4.25) 29(0.75,4.25) 30(0.25,4.25) 31(-0.25,4.25) 32(-0.75,4.25) 33(-1.25,4.25) 34(-1.75,4.25) 35(-2.25,4.25) 36(-2.75,4.25)
  rect 1.2x0.3 smd mask+0.05: 13(4.25,-2.75) 14(4.25,-2.25) 15(4.25,-1.75) 16(4.25,-1.25) 17(4.25,-0.75) 18(4.25,-0.25) 19(4.25,0.25) 20(4.25,0.75) 21(4.25,1.25) 22(4.25,1.75) 23(4.25,2.25) 24(4.25,2.75) 37(-4.25,2.75) 38(-4.25,2.25) 39(-4.25,1.75) 40(-4.25,1.25) 41(-4.25,0.75) 42(-4.25,0.25) 43(-4.25,-0.25) 44(-4.25,-0.75) 45(-4.25,-1.25) 46(-4.25,-1.75) 47(-4.25,-2.25) 48(-4.25,-2.75)
  silkscreen extent -4.2,-4.2 3,3, body extent -4.45,-4.45 4.55,4.55, height 1.5
MICRO_B_USB [mm]
  rect 0.4x1.35 smd mask+0.05: 1(1.3,0) 2(0.65,0) 3(0,0) 4(-0.65,0) 5(-1.3,0)
  rect 1.9x1.8 smd mask+0.05: ""(-3.8,-2.85) ""(3.8,-2.85)
  rect 2.1x1.6 smd mask+0.05: ""(-3.1,-0.127) ""(3.1,-0.127)
  silkscreen extent -4.9,-4.67 4.9,0.99, body extent -3.98,-5.45 3.94,0.21, height 2.79
PINHEADER1X5_RA [mm]
  rect 1.1x2 smd mask+0.05: 1(-5.08,0) 2(-2.54,0) 3(0,0) 4(2.54,0) 5(5.08,0)
  silkscreen extent -6.6,-11.1 6.6,0.8, body extent -6.6,-11.14 6.6,0.8, height 2.41
RES_0603 [mil]
  rect 38x31 smd mask+1.97: 1(-31.5,0) 2(31.5,0)
  silkscreen extent -55,-20 55,20, body extent -38,-19 39,19, height 17
RES_1206 [mm]
  rect 0.9x1.6 smd mask+0.05: 1(-1.45,0) 2(1.45,0)
  silkscreen extent -0.75,-0.7 0.75,0.7, body extent -1.98,-0.94 1.98,0.94, height 0.55
RES_AXIAL_W [mm]
  round 2 hole 1 mask+0.05: 1(-15.011,0) 2(14.935,-0.051)
  body extent -15.4,-4.82 15.33,4.83, height 9.65
SMB [mm]
  rect 2.25x2.12 smd mask+0.05: A(2.185,0) C(-2.185,0)
  silkscreen extent -2.79,-1.88 2.82,1.85, body extent -2.72,-1.78 2.72,1.78, height 2.44
SOD323F [mm]
  rect 1.05x0.55 smd mask+0.05: 1(-1.4,0) 2(1.4,0)
  silkscreen extent -0.71,-0.69 0.64,0.66, body extent -1.25,-0.67 1.25,0.67, height 1
SOIC8 [mm]
  rect 0.5x1.5 smd mask+0.05: 1(-1.905,-2.75) 2(-0.635,-2.75) 3(0.635,-2.75) 4(1.905,-2.75) 5(1.905,2.75) 6(0.635,2.75) 7(-0.635,2.75) 8(-1.905,2.75)
  silkscreen extent -2.6,-1.7 2.5,1.7, body extent -2.45,-3 2.45,3, height 1.75
SOIC14 [mm]
  rect 1.18x0.58 smd mask+0.05: 1(-2.66,3.81) 2(-2.66,2.54) 3(-2.66,1.27) 4(-2.66,0) 5(-2.66,-1.27) 6(-2.66,-2.54) 7(-2.66,-3.81) 8(2.66,-3.81) 9(2.66,-2.54) 10(2.66,-1.27) 11(2.66,0) 12(2.66,1.27) 13(2.66,2.54) 14(2.66,3.81)
  silkscreen extent -1.8,-4.39 1.8,4.42, body extent -3,-4.4 3,4.4, height 1.7
SOT23-5 [mm]
  rect 1.1x0.6 smd mask+0.05: 1(-1.3,0.95) 2(-1.3,0) 3(-1.3,-0.95) 4(1.3,-0.95) 5(1.3,0.95)
  silkscreen extent -0.58,-1.37 0.58,1.35, body extent -1.4,-1.45 1.4,1.45, height 1.45
SOT23-6L [mm]
  rect 1.2x0.6 smd mask+0.05: 1(-1.15,0.95) 2(-1.15,0) 3(-1.15,-0.95) 4(1.15,-0.95) 5(1.15,0) 6(1.15,0.95)
  silkscreen extent -1.66,-1.45 1.41,1.79, body extent -1.4,-1.46 1.4,1.46, height 1.42
SOT223 [mm]
  rect 1.2x1.6 hole 0.5 mask+0.05: 1(-2.3,-3.2) 2(0,-3.2) 3(2.3,-3.2)
  rect 3.3x1.6 hole 0.5 mask+0.05: 2(0,3.2)
  silkscreen extent -3.2,-1.8 3.3,1.8, body extent -3.25,-3.48 3.25,3.48, height 1.65
SOT-23F#1 [mm]
  rect 0.8x1.1 hole 0.5 mask+0.05: 1(-0.95,-0.945) 2(0.95,-0.945) 3(0,0.945)
  silkscreen extent -1.5,0.1 1.5,0.9, body extent -1.5,-1.42 1.5,1.42, height 1.2
SOT-23F#2 [mm]
  rect 0.8x1.1 smd mask+0.05: 1(-0.95,-0.945) 2(0.95,-0.945) 3(0,0.945)
  silkscreen extent -1.5,0.1 1.5,0.9, body extent -1.5,-1.42 1.5,1.42, height 1.2
TBP01R1-508 [mm]
  round 3 hole 1.75 mask+0.05: 1(-2.54,0) 2(2.54,0)
  silkscreen extent -5.9,-4.5 5.9,2, body extent -5.88,-10 5.88,2, height 8.5

## Part data
BR1: library part DB105STR, Manufacturer="SMC Diode Solutions", Max Current=1A, Operating Voltage=600V, Supplier Part Number=1655-1821-1-ND, Case/Package=DB105STR, Designed By=ALİ, Manufacturer Product Number=DB105STR, RoHS=No, Supplier 1=Digi-Key
BZ1: "Buzzers Indicator, Internally Driven Magnetic 5 V 30mA 2.7kHz 80dB @ 5V, 10cm Through Hole PC Pins", Case/Package=CMI-9605IC, Manufacturer="CUI Devices", Supplier Part Number=2223-CMI-9605IC-0580T-ND, Category="Audio Products", Designed By=ALİ, Manufacturer Part Number=CMI-9605IC-0580T, Pricing="1=1,43, 10=1,19, 25=1,1016, 50=1,037, 100=0,9745, 500=0,83848, 1000=0,78382, 5000=0,7681 (USD)", RoHS=No, Stock=6002, Supplier=Digi-Key
C1 C3 C7 C14 C20 C23 C26 C28 C35 C44 C47: library part "CAP CER 1uF 0805", "CAP CER 1uF 0805 %10", Case Code (Metric)=2012, Case Code (Imperial)=0805, Dielectric=X7R, Manufacturer=Samsung, Max Operating Temperature=125°C, Min Operating Temperature=-55°C, Package Quantity=1, Supplier Part Number=1276-1029-1-ND, Tolerance=10%, Voltage=50V, Case/Package=0805, Category="Ceramic Capacitors", ComponentLink1Description=https://datasheet.ciiva.com/25800/cl21b105kbfnnne-25800291.pdf?src-supplier=Digi-Key, ComponentLink1URL=https://datasheet.ciiva.com/25800/cl21b105kbfnnne-25800291.pdf?src-supplier=Digi-Key, ComponentLink2Description=https://datasheet.ciiva.com/16449/cl21b105kbfnnne-16449003.pdf?src-supplier=Future+Electronics, ComponentLink2URL=https://datasheet.ciiva.com/16449/cl21b105kbfnnne-16449003.pdf?src-supplier=Future+Electronics, Construction=Flat, Depth=1.25mm, Designed By=ALİ, Height=1.25mm, Length=2mm, Manufacturer Part Number=CL21B105KBFNNNE, Material=4241ConductorMaterial, Mounting Technology="Surface Mount", Packaging="Tape and Reel", Pricing="1=0,11, 10=0,079, 50=0,045, 100=0,0373, 500=0,02616, 1000=0,02165 (USD)", Radiation Hardening=No, RoHS=Yes, RoHS Compliant=Yes, Series=CL, Stock=212507, Supplier=Digi-Key, Thickness=0.053inch, Voltage Rating=50V, Voltage Rating (DC)=50V, Width=0.049inch
C2 C18 C21 C24 C25: library part "CAP CER 100nF 0805", "CAP CER 100nF 0805 %10", Case Code (Metric)=2012, Case Code (Imperial)=0805, Dielectric=X7R, Manufacturer=Samsung, Max Operating Temperature=125°C, Min Operating Temperature=-55°C, Supplier Part Number=1276-1003-1-ND, Tolerance=10%, Voltage=50V, Case/Package=0805, Category="Ceramic Capacitors", ComponentLink1Description=https://datasheet.ciiva.com/25710/cl21b104kbcnnnc-25710182.pdf?src-supplier=Digi-Key, ComponentLink1URL=https://datasheet.ciiva.com/25710/cl21b104kbcnnnc-25710182.pdf?src-supplier=Digi-Key, ComponentLink2Description=https://datasheet.ciiva.com/29199/454152-da-01-en-vs-kondensator-0805-29199814.pdf?src-supplier=Conrad, ComponentLink2URL=https://datasheet.ciiva.com/29199/454152-da-01-en-vs-kondensator-0805-29199814.pdf?src-supplier=Conrad, Construction=Flat, Depth=1.25mm, Designed By=ALİ, Height=0.85mm, Lead Free="Lead Free", Length=2mm, Manufacturer Part Number=CL21B104KBCNNNC, Material=Ceramic, Mounting Technology="Surface Mount", Packaging="Tape and Reel", Pricing="1=0,1, 10=0,044, 50=0,024, 100=0,0196, 500=0,01404, 1000=0,01103 (USD)", Radiation Hardening=No, RoHS=Yes, RoHS Compliant=Yes, Series=CL, Stock=1569480, Supplier=Digi-Key, Thickness=0.037inch, Voltage Rating=50V, Voltage Rating (DC)=50V, Width=0.049inch
C4 C15 C29 C30 C31 C32 C39 C41 C43 C45 C46: library part "CAP CER 100nF 0603", "CAP CER 100nF 0603 %10", Case Code (Metric)=1608, Case Code (Imperial)=0603, Dielectric=X7R, Manufacturer=KEMET, Manufacturer Part Number=C0603C104K5RECAUTO, Max Operating Temperature=125°C, Min Operating Temperature=-55°C, Ratings=AEC-Q200, Supplier Part Number=399-14105-1-ND, Temperature Coefficient=30ppm/°C, Tolerance=10%, Voltage=50V, Case/Package=0603, Category="Ceramic Capacitors", Designed By=ALİ, Lead Free=5697LeadFree, Length=0.063inch, Material=4241ConductorMaterial, Mounting Technology="Surface Mount", Packaging="Cut Tape", Pricing="1=0,21, 10=0,144, 50=0,0864, 100=0,073, 500=0,04992, 1000=0,04416 (USD)", RoHS=Yes, RoHS Compliant=Yes, Series=C, Stock=4649, Supplier=Digi-Key, Thickness=0.034inch, Voltage Rating=50V, Width=0.031inch
C5 C38 C40: library part "CAP CER 10nF 0603", "CAP CER 10nF 0603 %10", Manufacturer="Walsin Technologies", Supplier Part Number=1292-1384-1-ND, Category="Ceramic Capacitors", ComponentLink1Description=http://www.farnell.com/datasheets/1958513.pdf?src-supplier=Farnell, ComponentLink1URL=http://www.farnell.com/datasheets/1958513.pdf?src-supplier=Farnell, ComponentLink2Description=http://www.passivecomponent.com/wp-content/uploads/2018/10/MLCC.pdf?src-supplier=Digi-Key, ComponentLink2URL=http://www.passivecomponent.com/wp-content/uploads/2018/10/MLCC.pdf?src-supplier=Digi-Key, ComponentLink3Description=https://datasheet.octopart.com/0603B103K160CT-Walsin-Technologies-datasheet-85392065.pdf?src-supplier=Element14, ComponentLink3URL=https://datasheet.octopart.com/0603B103K160CT-Walsin-Technologies-datasheet-85392065.pdf?src-supplier=Element14, ComponentLink4Description=https://datasheet.octopart.com/0603B103K160CT-Walsin-Technologies-datasheet-136037192.pdf?src-supplier=Future+Electronics, ComponentLink4URL=https://datasheet.octopart.com/0603B103K160CT-Walsin-Technologies-datasheet-136037192.pdf?src-supplier=Future+Electronics, ComponentLink5Description=https://datasheet.octopart.com/0603B103K160CT-Walsin-Technologies-datasheet-62066062.pdf?src-supplier=TME, ComponentLink5URL=https://datasheet.octopart.com/0603B103K160CT-Walsin-Technologies-datasheet-62066062.pdf?src-supplier=TME, Designed By=ALİ, Manufacturer Part Number=0603B103K160CT, Pricing="1=0,1, 10=0,033, 50=0,0182, 100=0,0148, 500=0,0106, 1000=0,00833 (USD)", RoHS=Yes, Stock=42393, Supplier=Digi-Key
C6 C11 C12 C13 C19 C27 C33 C34 C42: library part "CAP CER 4.7uF 0805", "CAP CER 4.7uF 0805 %10", Case Code (Metric)=2012, Case Code (Imperial)=0805, Dielectric=X5R, Manufacturer=Samsung, Max Operating Temperature=85°C, Min Operating Temperature=-55°C, Supplier Part Number=1276-1244-2-ND, Tolerance=10%, Voltage Rating=25V, Case/Package=0805, Category="Ceramic Capacitors", ComponentLink1Description=https://datasheet.ciiva.com/25798/cl21a475kaqnnne-25798882.pdf?src-supplier=Digi-Key, ComponentLink1URL=https://datasheet.ciiva.com/25798/cl21a475kaqnnne-25798882.pdf?src-supplier=Digi-Key, Construction=Flat, Depth=1.25mm, Designed By=ALİ, Height=1.25mm, Lead Free="Lead Free", Length=2mm, Manufacturer Part Number=CL21A475KAQNNNE, Material=4241ConductorMaterial, Mounting Technology="Surface Mount", Packaging="Tape and Reel", Pricing="2000=0,01856, 4000=0,01698, 10000=0,0158, 14000=0,01501, 50000=0,01303, 100000=0,01077, 200000=0,0105 (USD)", Radiation Hardening=No, RoHS=Yes, RoHS Compliant=Yes, Series=CL, Stock=3903395, Supplier=Digi-Key, Voltage Rating (DC)=25V
C8: library part "CAP ALU 68uF", "Cap Aluminum Lytic 68uF 35V 20%( 6.3 X 7.7mm) SMD 0.34 Ohm 280mA 2000h 105C T/R", Manufacturer=KEMET, Supplier Part Number=399-6722-1-ND, Category="Aluminum Electrolytic Capacitors", ComponentLink1Description=https://datasheet.ciiva.com/5365/kem-a4002-eev-535332-5365784.pdf?src-supplier=Mouser, ComponentLink1URL=https://datasheet.ciiva.com/5365/kem-a4002-eev-535332-5365784.pdf?src-supplier=Mouser, Designed By=ALİ, Manufacturer Part Number=EEV686M035A9HAA, Pricing="1=0,59, 10=0,415, 50=0,3134, 100=0,273, 500=0,2022 (USD)", RoHS=Yes, Stock=22851, Supplier=Digi-Key
C9 C10 C22: library part "CAP ALU ELEC 470uF 50V", "Cap, 470UF, 50V, Alu Elec, Radial", Manufacturer=KEMET, Supplier Part Number=399-15683-ND, ComponentLink1Description=https://api.kemet.com/component-edge/download/datasheet/ESH477M050AH4AA.pdf?src-supplier=Digi-Key, ComponentLink1URL=https://api.kemet.com/component-edge/download/datasheet/ESH477M050AH4AA.pdf?src-supplier=Digi-Key, ComponentLink2Description=https://datasheet.octopart.com/ESH477M050AH4AA-KEMET-datasheet-130075338.pdf?src-supplier=Newark, ComponentLink2URL=https://datasheet.octopart.com/ESH477M050AH4AA-KEMET-datasheet-130075338.pdf?src-supplier=Newark, Desiged by=ALİ, Manufacturer Part Number=ESH477M050AH4AA, Pricing="1=0,64, 10=0,455, 50=0,344, 100=0,2997, 500=0,222, 1000=0,1887, 2500=0,1776, 5000=0,1665 (USD)", RoHS=Yes, Stock=6383, Supplier=Digi-Key
C16 C17: library part "CAP CER 20pF 0603", "CAP CER 20pF 0603 %15 SMD", Manufacturer=Samsung, Supplier Part Number=1276-1187-6-ND, Category="Ceramic Capacitors", ComponentLink1Description=https://datasheet.ciiva.com/26877/getdatasheetpartid-640634-26877974.pdf?src-supplier=Verical, ComponentLink1URL=https://datasheet.ciiva.com/26877/getdatasheetpartid-640634-26877974.pdf?src-supplier=Verical, ComponentLink2Description=https://datasheet.ciiva.com/26310/mlcc-catalogdownload2013-eng-26310315.pdf?src-supplier=Distrelec, ComponentLink2URL=https://datasheet.ciiva.com/26310/mlcc-catalogdownload2013-eng-26310315.pdf?src-supplier=Distrelec, Designed By=ALİ, Manufacturer Part Number=CL10C200JB8NNNC, Pricing="1=0,1, 10=0,044, 50=0,0238, 100=0,0194, 500=0,01386, 1000=0,01089 (USD)", RoHS=Yes, Stock=413243, Supplier=Digi-Key
C36 C37: library part "CAP CER 33uF 1206", "Multilayer Ceramic Capacitor, 33 uF, 25 V, ± 20%, X5R, 1206 [3216 Metric]", Manufacturer=TDK, Supplier Part Number=445-8046-6-ND, Category="Ceramic Capacitors", ComponentLink1Description=https://datasheet.ciiva.com/24216/c3216x5r1e336m160ac-265051-24216512.pdf?src-supplier=Mouser, ComponentLink1URL=https://datasheet.ciiva.com/24216/c3216x5r1e336m160ac-265051-24216512.pdf?src-supplier=Mouser, ComponentLink2Description=https://datasheet.ciiva.com/6285/tdkmlcccaprange-6285278.pdf?src-supplier=Digi-Key, ComponentLink2URL=https://datasheet.ciiva.com/6285/tdkmlcccaprange-6285278.pdf?src-supplier=Digi-Key, Designed By=ALİ, Manufacturer Part Number=C3216X5R1E336M160AC, Material=4241ConductorMaterial, Pricing="1=0,96, 10=0,758, 50=0,6564, 100=0,5681, 500=0,42924, 1000=0,37875 (USD)", RoHS=Yes, Stock=216892, Supplier=Digi-Key
D1: "Diode Zener Single 5.6V", Manufacturer="ON Semiconductor", Supplier Part Number=863-1SMB5919BT3G, Working Voltage=5.6V, Category="Zener Diodes", ComponentLink1Description=https://datasheet.ciiva.com/27747/1308331-27747654.pdf?src-supplier=Jameco, ComponentLink1URL=https://datasheet.ciiva.com/27747/1308331-27747654.pdf?src-supplier=Jameco, ComponentLink2Description=https://datasheet.ciiva.com/895/1smb5913bt3-d-895203.pdf?src-supplier=Digi-Key, ComponentLink2URL=https://datasheet.ciiva.com/895/1smb5913bt3-d-895203.pdf?src-supplier=Digi-Key, ComponentLink3Description=https://datasheet.ciiva.com/895/1smb5913bt3-d-895204.pdf?src-supplier=Digi-Key, ComponentLink3URL=https://datasheet.ciiva.com/895/1smb5913bt3-d-895204.pdf?src-supplier=Digi-Key, ComponentLink4Description=https://datasheet.ciiva.com/895/1smb5913bt3-d-895205.pdf?src-supplier=Digi-Key, ComponentLink4URL=https://datasheet.ciiva.com/895/1smb5913bt3-d-895205.pdf?src-supplier=Digi-Key, ComponentLink5Description=https://datasheet.ciiva.com/15198/getdatasheetpartid-311040-15198695.pdf?src-supplier=Verical, ComponentLink5URL=https://datasheet.ciiva.com/15198/getdatasheetpartid-311040-15198695.pdf?src-supplier=Verical, ComponentLink6Description=https://datasheet.ciiva.com/1182/1smb5913bt3-d-1182657.pdf?src-supplier=Element14, ComponentLink6URL=https://datasheet.ciiva.com/1182/1smb5913bt3-d-1182657.pdf?src-supplier=Element14, ComponentLink7Description=https://datasheet.ciiva.com/1182/1smb5913bt3-d-1182658.pdf?src-supplier=Element14, ComponentLink7URL=https://datasheet.ciiva.com/1182/1smb5913bt3-d-1182658.pdf?src-supplier=Element14, ComponentLink8Description=https://datasheet.ciiva.com/16311/1smb5913bt3-d-16311847.pdf?src-supplier=Future+Electronics, ComponentLink8URL=https://datasheet.ciiva.com/16311/1smb5913bt3-d-16311847.pdf?src-supplier=Future+Electronics, Designed By=ALİ, Manufacturer Part Number=1SMB5919BT3G, Pricing="1=0,49, 10=0,357, 50=0,357, 100=0,223, 1000=0,119, 10000=0,101 (USD)", RoHS=Yes, Stock=1812, Supplier=Mouser
D2 D3 D4 D5 D6: "Diode, Single, 75V, 150mA, 1V, 4ns", Average Rectified Current=150mA, Manufacturer="ON Semiconductor / Fairchild", Max Forward Surge Current (Ifsm)=2A, Max Operating Temperature=150°C, Max Repetitive Reverse Voltage (Vrrm)=75V, Max Reverse Current=5uA, Min Operating Temperature=-55°C, Package Quantity=1, Supplier Part Number=1N4148WSFSCT-ND, Category="Rectifier Diodes", ComponentLink1Description=https://datasheet.ciiva.com/15208/getdatasheetpartid-127819-15208358.pdf?src-supplier=Verical, ComponentLink1URL=https://datasheet.ciiva.com/15208/getdatasheetpartid-127819-15208358.pdf?src-supplier=Verical, ComponentLink2Description=https://datasheet.ciiva.com/8300/1n914bws-8300360.pdf?src-supplier=Avnet, ComponentLink2URL=https://datasheet.ciiva.com/8300/1n914bws-8300360.pdf?src-supplier=Avnet, Designed By=ALİ, Element Configuration=Single, Forward Current=150mA, Height=1mm, Lead Free="Lead Free", Length=1.8mm, Manufacturer Part Number=1N4148WS, Max Reverse Voltage (DC)=75V, Mounting Technology="Surface Mount", Packaging="Tape and Reel", Pins=2, Pricing="1=0,17, 10=0,159, 100=0,0867, 500=0,05332, 1000=0,03636 (USD)", Radiation Hardening=No, Reach SVHC Compliant=No, Recovery Time=4ns, Reverse Recovery Time=4ns, Reverse Voltage=75V, RoHS=Yes, RoHS Compliant=Yes, Series=-, Stock=1311720, Supplier=Digi-Key, Weight=0.0276g, Width=1.35mm
D7: library part "LED GREEN 0805", Case/Package=0805, Color=Green, Forward Current=30mA, Forward Voltage=2.1V, Manufacturer="Vishay Lite-On", Manufacturer Part Number=LTST-C17GKT, Power Rating=100mW, Reverrse Voltage=5V, Supplier Part Number=160-1423-1-ND, Category=LEDs, Depth=1.25mm, Designed By=ALİ, Height=0.8mm, Lenght=2mm, Mount="Surface Mount", RoHS=Yes, Supplier 1=Digi-Key, Width=1.25mm
D8: library part "LED RED 0805", lllumination Color=Red, Package Quantity=1, Reverse Voltage=5V, Supplier Part Number=475-1415-1-ND, Depth=1.35mm, Designed By=ALİ, Lenght=2.1mm, Lens Size=1.25mm, Lens Transparency=Diffused, Luminous Flux=0.17Im, RoHS Compliant=Yes, Series=CHipLED, Width=1.25mm
F1: "Fuse Chip Fast Acting 1A 32V SMD Solder Pad 1206 Glass T/R VDE/cULus", Case Code (Metric)=3216, Case Code (Imperial)=1206, Current Rating=1A, DC Cold Resistance=94.2mR, Manufacturer=Schurter, Manufacturer Part Number=3413.0216.22, Max Operating Temperature=90°C, Min Operating Temperature=-55°C, Package Quantity=1000, Supplier Part Number=486-1144-1-ND, Voltage Rating=32V, Voltage Rating (DC)=63V, Approvals=VDE,cURus, Body Material=Glass,Epoxy, Case/Package=1206, Category=Fuses, ComponentLink1Description=https://datasheet.ciiva.com/301/typ-usi-1206-301440.pdf?src-supplier=Digi-Key, ComponentLink1URL=https://datasheet.ciiva.com/301/typ-usi-1206-301440.pdf?src-supplier=Digi-Key, ComponentLink2Description=https://datasheet.ciiva.com/8264/typ-usi-1206-8264583.pdf?src-supplier=Avnet, ComponentLink2URL=https://datasheet.ciiva.com/8264/typ-usi-1206-8264583.pdf?src-supplier=Avnet, ComponentLink3Description=https://datasheet.ciiva.com/301/typ-usi-1206-301439.pdf?src-supplier=Digi-Key, ComponentLink3URL=https://datasheet.ciiva.com/301/typ-usi-1206-301439.pdf?src-supplier=Digi-Key, ComponentLink4Description=https://datasheet.ciiva.com/301/typ-usi-1206-301441.pdf?src-supplier=Digi-Key, ComponentLink4URL=https://datasheet.ciiva.com/301/typ-usi-1206-301441.pdf?src-supplier=Digi-Key, ComponentLink5Description=https://datasheet.ciiva.com/14541/70160006-14541114.pdf?src-supplier=Allied+Electronics, ComponentLink5URL=https://datasheet.ciiva.com/14541/70160006-14541114.pdf?src-supplier=Allied+Electronics, ComponentLink6Description=https://datasheet.ciiva.com/14102/qousi1206-data-e-14102903.pdf?src-supplier=Distrelec, ComponentLink6URL=https://datasheet.ciiva.com/14102/qousi1206-data-e-14102903.pdf?src-supplier=Distrelec, ComponentLink7Description=https://datasheet.ciiva.com/16316/typ-usi-1206-16316588.pdf?src-supplier=Future+Electronics, ComponentLink7URL=https://datasheet.ciiva.com/16316/typ-usi-1206-16316588.pdf?src-supplier=Future+Electronics, Contact Plating=Gold, Designed By=ALİ, Fuse Type="Board Mount (Cartridge Style Excluded)", Height=0.6mm, Lead Free="Lead Free", Length=3.2mm, Mounting Technology="Surface Mount,PCB", Packaging="Tape and Reel", Pins=2, Pricing="1=0,67, 50=0,524, 100=0,397, 500=0,3132 (USD)", RoHS=Yes, RoHS Compliant=Yes, Series="USI 1206", Stock=853, Supplier=Digi-Key, Terminal Material=Tin, Termination=SMD/SMT, Voltage Rating (AC)=32V, Weight=0.000212oz, Width=1.6mm, Working Voltage=32V
J1 J2: "2.0 x 6.3 mm, 5.0 A, Horizontal, Surface Mount (SMT), Dc Power Jack Connector", Case/Package=SMD/SMT, Color=Black, Current Rating=5A, Flammability Rating="UL94 V-0", Manufacturer=CUI, Max Operating Temperature=85°C, Min Operating Temperature=-25°C, Package Quantity=200, Supplier Part Number=CP-037AHPJCT-ND, Voltage Rating=24V, Insulation Resistance=100MR, Category=Uncategorized, ComponentLink1Description=http://www.mouser.com/ds/2/670/pj-037ah-smt-516065.pdf?src-supplier=Mouser, ComponentLink1URL=http://www.mouser.com/ds/2/670/pj-037ah-smt-516065.pdf?src-supplier=Mouser, ComponentLink2Description=https://www.cui.com/product/resource/digikeypdf/pj-037ah-smt-tr.pdf?src-supplier=Digi-Key, ComponentLink2URL=https://www.cui.com/product/resource/digikeypdf/pj-037ah-smt-tr.pdf?src-supplier=Digi-Key, ComponentLink3Description=http://www.cui.com/product/resource/digikeypdf/pj-037ah-smt.pdf?src-supplier=Digi-Key, ComponentLink3URL=http://www.cui.com/product/resource/digikeypdf/pj-037ah-smt.pdf?src-supplier=Digi-Key, Connector Type=Jack, Contact Gender=Male, Contact Material=Copper, Contact Plating=Nickel, Designed By=ALİ, Gender=Male, Housing Color=Black, Housing Material=Thermoplastic, Manufacturer Part Number=PJ-037AH-SMT-TR, Mounting Technology="Surface Mount,Through Hole", Number of Conductors=2, Orientation=Horizontal, Packaging="Tape and Reel", RoHS=Yes, Shielding=Unshielded, Supplier=Digi-Key, Termination=Solder
J3 J4 J5: "2~24 Poles, Pluggable, Receptacle, Horizontal, 5.08 Pitch, Terminal Block Connector", Manufacturer="CUI Devices", Supplier Part Number=102-6406-ND, Category="Terminal Blocks", ComponentLink1Description=https://www.cuidevices.com/product/resource/digikeypdf/tbp01r1-508.pdf?src-supplier=Digi-Key, ComponentLink1URL=https://www.cuidevices.com/product/resource/digikeypdf/tbp01r1-508.pdf?src-supplier=Digi-Key, ComponentLink2Description=https://datasheet.octopart.com/TBP01R1-508-02BE-CUI-Devices-datasheet-147843976.pdf?src-supplier=Future+Electronics, ComponentLink2URL=https://datasheet.octopart.com/TBP01R1-508-02BE-CUI-Devices-datasheet-147843976.pdf?src-supplier=Future+Electronics, ComponentLink3Description=https://datasheet.octopart.com/TBP01R1-508-02BE-CUI-Devices-datasheet-154730754.pdf?src-supplier=Electro+Sonic, ComponentLink3URL=https://datasheet.octopart.com/TBP01R1-508-02BE-CUI-Devices-datasheet-154730754.pdf?src-supplier=Electro+Sonic, Designed By=ALİ, Manufacturer Part Number=TBP01R1-508-02BE, Pricing="1=0,56, 10=0,296, 25=0,2096, 50=0,1784, 100=0,1722, 250=0,1456, 500=0,13464, 1000=0,11898, 5000=0,0908 (USD)", RoHS=Yes, Stock=122033, Supplier=Digi-Key
J6 J8: library part 64800611622_conn_6pin, "1.50mm 6 Pin Connector", Manufacturer="Wurth Electronics", Supplier Part Number=732-64800611622-ND, Category=Uncategorized, Manufacturer Part Number=64800611622, Pricing="1=0,42, 50=0,406, 100=0,384, 250=0,361, 500=0,339 (USD)", RoHS=No, Stock=904, Supplier=Digi-Key
J7: ".100 C.L. HORIZONTAL SMT SOCKET", Flammability Rating="UL94 V-0", Manufacturer=Samtec, Max Operating Temperature=125°C, Min Operating Temperature=-55°C, Supplier Part Number=SAM11813-ND, Insulation Color=Black, Category=Connectors, ComponentLink1Description=http://www.farnell.com/datasheets/1927708.pdf?_ga=2.237598468.569325269.1503285096-1413671594.1503025027&src-supplier=Farnell, ComponentLink1URL=http://www.farnell.com/datasheets/1927708.pdf?_ga=2.237598468.569325269.1503285096-1413671594.1503025027&src-supplier=Farnell, ComponentLink2Description=http://www.samtec.com/documents/webfiles/pdf/SMH.PDF?src-supplier=Newark, ComponentLink2URL=http://www.samtec.com/documents/webfiles/pdf/SMH.PDF?src-supplier=Newark, ComponentLink3Description=http://www.samtec.com/documents/webfiles/pdf/SMH.PDF?src-supplier=Avnet, ComponentLink3URL=http://www.samtec.com/documents/webfiles/pdf/SMH.PDF?src-supplier=Avnet, ComponentLink4Description=http://suddendocs.samtec.com/catalog_english/smh.pdf?src-supplier=Digi-Key, ComponentLink4URL=http://suddendocs.samtec.com/catalog_english/smh.pdf?src-supplier=Digi-Key, Connector Type=Receptacle, Contact Finish - Mating=GOLD, Contact Material=Bronze, Contact Plating=Gold, Contact Shape=Square, Contact Type=Forked, Designed By=ALİ, Fastening Type=Pull, Gender=Receptacle, Manufacturer Part Number=SMH-105-02-L-S, Number of Contacts=5, Number of Positions=5, Number of Rows=1, Orientation=Horizontal, Packaging=Rail/Tube, Pitch=2.54mm, Pricing="1=2,18, 10=1,899, 100=1,6968, 500=1,414, 1000=1,212, 5000=1,07464 (USD)", Radiation Hardening=No, Reach SVHC Compliant=No, RoHS=Yes, RoHS Compliant=Yes, Series=SMH, Stock=47, Supplier=Digi-Key, Termination=Solder, Insulation Material=Polymer
L1: library part "IND 47uH", "Power Inductor, Aec-Q200, 47Uh, 0.39A Rohs Compliant: Yes", Case Code (Metric)=3030, Case Code (Imperial)=1212, Current Rating=390mA, DC Resistance (DCR)=2.3R, Manufacturer="Wurth Electronics", Max Operating Temperature=125°C, Min Operating Temperature=-40°C, Ratings=AEC-Q200, Saturation Current=1.18A, Self Resonant Frequency=8MHz, Supplier Part Number=732-6947-1-ND, Test Frequency=100kHz, Tolerance=30%, Case/Package=1212, Category="Fixed Inductors", ComponentLink1Description=https://media.digikey.com/pdf/Data%20Sheets/Wurth%20Electronics%20PDFs/Q+_Products_Flyer.pdf?src-supplier=Digi-Key, ComponentLink1URL=https://media.digikey.com/pdf/Data%20Sheets/Wurth%20Electronics%20PDFs/Q+_Products_Flyer.pdf?src-supplier=Digi-Key, Core Material=Ferrite, Designed By=ALİ, Height - Seated (Max)=0.059inch, Length=0.118inch, Manufacturer Part Number=78438335470, Mounting Technology="Surface Mount", Packaging="Cut Tape", Pricing="1=2,11, 50=1,97, 250=1,803, 500=1,672 (USD)", RoHS=Yes, RoHS Compliant=Yes, Series=WE-MAIA, Shielding=Shielded, Stock=14869, Supplier=Digi-Key, Width=0.118inch
Q1 Q2 Q3 Q4 Q5: "Transistor General Purpose BJT NPN 40 Volt 0.2A Automotive 3-Pin SOT-23", Case/Package=SOT-23, Clock Frequency=300MHz, Collector Base Voltage (VCBO)=60V, Collector Emitter Breakdown Voltage=40V, Collector Emitter Saturation Voltage=300mV, Continuous Collector Current=200mA, Emitter Base Voltage (VEBO)=6V, Manufacturer="Diodes Zetex", Max Operating Temperature=150°C, Max Power Dissipation=300mW, Min Operating Temperature=-55°C, Package Quantity=3000, Power Dissipation=350mW, Supplier Part Number=MMBT3904-FDICT-ND, Category=BJTs, Collector Emitter Voltage (VCEO)=40V, Collector-emitter Voltage-Max=300mV, ComponentLink1Description=https://datasheet.ciiva.com/11201/ds30036-11201778.pdf?src-supplier=Avnet, ComponentLink1URL=https://datasheet.ciiva.com/11201/ds30036-11201778.pdf?src-supplier=Avnet, ComponentLink2Description=https://datasheet.ciiva.com/15138/getdatasheetpartid-53265-15138780.pdf?src-supplier=Verical, ComponentLink2URL=https://datasheet.ciiva.com/15138/getdatasheetpartid-53265-15138780.pdf?src-supplier=Verical, ComponentLink3Description=https://datasheet.ciiva.com/22711/1915516-22711750.pdf?src-supplier=Element14, ComponentLink3URL=https://datasheet.ciiva.com/22711/1915516-22711750.pdf?src-supplier=Element14, ComponentLink4Description=https://datasheet.ciiva.com/11198/ds30036-11198999.pdf?src-supplier=Avnet, ComponentLink4URL=https://datasheet.ciiva.com/11198/ds30036-11198999.pdf?src-supplier=Avnet, ComponentLink5Description=https://datasheet.ciiva.com/6361/ds30036-6361256.pdf?src-supplier=Digi-Key, ComponentLink5URL=https://datasheet.ciiva.com/6361/ds30036-6361256.pdf?src-supplier=Digi-Key, ComponentLink6Description=https://datasheet.ciiva.com/6361/ds30036-6361254.pdf?src-supplier=Digi-Key, ComponentLink6URL=https://datasheet.ciiva.com/6361/ds30036-6361254.pdf?src-supplier=Digi-Key, Designed By=ALİ, Frequency=300MHz, Gain Bandwidth Product=300MHz, Height=1mm, hFE Min=100, Lead Free="Lead Free", Length=3.05mm, Manufacturer Part Number=MMBT3904-7-F, Max Breakdown Voltage=40V, Max Collector Current=200mA, Mounting Technology="Surface Mount", Number of Elements=1, Packaging="Tape and Reel", Pins=3, Polarity=NPN, Pricing="1=0,12, 10=0,111, 100=0,0607, 500=0,03732, 1000=0,02545 (USD)", Radiation Hardening=No, Reach SVHC Compliant=No, RoHS=Yes, RoHS Compliant=Yes, Series="Automotive, AEC-Q101", Stock=5948624, Supplier=Digi-Key, Transition Frequency=300MHz, Voltage Rating (DC)=40V, Weight=0.000282oz, Width=1.4mm
R1: library part 5WD27, Resistance=270M, Designed By=ALİ
R2 R4 R13 R28 R34 R35: library part "RES 1K OHM 0603", "SMD Chip Resistor, 1 kOhm, ± 5%, 100 mW, 0603 [1608 Metric], Thick Film, General Purpose", Case Code (Metric)=1608, Case Code (Imperial)=0603, Manufacturer=Yageo, Max Operating Temperature=155°C, Max Power Dissipation=100mW, Min Operating Temperature=-55°C, Package Quantity=5000, Resistance Tolerance=5%, Resistor Type="Thick Film", Supplier Part Number=311-1.0KGRCT-ND, Temperature Coefficient=100ppm/°C, Voltage Rating=50V, Body Length=1.6mm, Case/Package=0603, Category="Chip SMD Resistors", Construction=Rectangular, Contact Plating=Tin,Matte, Depth=0.8mm, Height=0.45mm, Lead Free="Lead Free", Length=1.6mm, Manufacturer Part Number=RC0603JR-071KL, Military Standard=Not, Number of Terminations=2, Packaging="Tape and Reel", Pins=2, Power Rating=100mW, Pricing="1=0,1, 10=0,014, 50=0,0088, 100=0,0073, 500=0,00486, 1000=0,00415 (USD)", Reach SVHC Compliant=No, RoHS=Yes, RoHS Compliant=Yes, Series=RC, Stock=1163860, Supplier=Digi-Key, Termination=SMD/SMT, Tolerance=5%, Voltage Rating (AC)=50V, Voltage Rating (DC)=50V, Width=0.8mm
R3 R5 R24 R25 R26: library part "RES 10K OHM 0603", "RES 10K %1 OHM 0603 SMD", Case Code (Metric)=1608, Case Code (Imperial)=0603, Manufacturer=Yageo, Max Operating Temperature=155°C, Max Power Dissipation=100mW, Min Operating Temperature=-55°C, Resistance Tolerance=1%, Resistor Type="Thick Film", Supplier Part Number=311-10.0KHRTR-ND, Temperature Coefficient=100ppm/°C, Voltage Rating=75V, Voltage Rating (DC)=50V, Case/Package=0603, Category="Chip SMD Resistors", ComponentLink1Description=https://datasheet.ciiva.com/7660/38590-7660789.pdf?src-supplier=Element14, ComponentLink1URL=https://datasheet.ciiva.com/7660/38590-7660789.pdf?src-supplier=Element14, ComponentLink2Description=https://datasheet.ciiva.com/7983/443971-7983596.pdf?src-supplier=Element14, ComponentLink2URL=https://datasheet.ciiva.com/7983/443971-7983596.pdf?src-supplier=Element14, ComponentLink3Description=https://datasheet.ciiva.com/22747/443971-22747519.pdf?src-supplier=Element14, ComponentLink3URL=https://datasheet.ciiva.com/22747/443971-22747519.pdf?src-supplier=Element14, ComponentLink4Description=https://datasheet.ciiva.com/46440/1868787-46440891.pdf?src-supplier=Element14, ComponentLink4URL=https://datasheet.ciiva.com/46440/1868787-46440891.pdf?src-supplier=Element14, ComponentLink5Description=https://datasheet.ciiva.com/7746/1738695-7746239.pdf?src-supplier=Element14, ComponentLink5URL=https://datasheet.ciiva.com/7746/1738695-7746239.pdf?src-supplier=Element14, ComponentLink6Description=https://datasheet.ciiva.com/15189/getdatasheetpartid-409289-15189591.pdf?src-supplier=Verical, ComponentLink6URL=https://datasheet.ciiva.com/15189/getdatasheetpartid-409289-15189591.pdf?src-supplier=Verical, Construction=Rectangular, Depth=0.8mm, Designed By=ALİ, Features="Moisture Resistant", Height=0.45mm, Lead Free="Lead Free", Lead Pitch=0.3mm, Length=1.6mm, Manufacturer Part Number=RC0603FR-0710KL, Military Standard=Not, Number of Terminations=2, Packaging="Tape and Reel", Pins=2, Power Rating=100mW, Pricing="5000=0,00363, 10000=0,00318, 25000=0,00272, 35000=0,00264, 50000=0,00244, 125000=0,0022 (USD)", Reach SVHC Compliant=No, RoHS=Yes, RoHS Compliant=Yes, Series=RC, Stock=24754690, Supplier=Digi-Key, Termination=SMD/SMT, Tolerance=1%, Weight=7.1E-05oz, Width=0.8mm